# Allegro board RK3568_Template_DDR4P416DD6_51x33_1600MHz_V10_20210129YWQ.brd
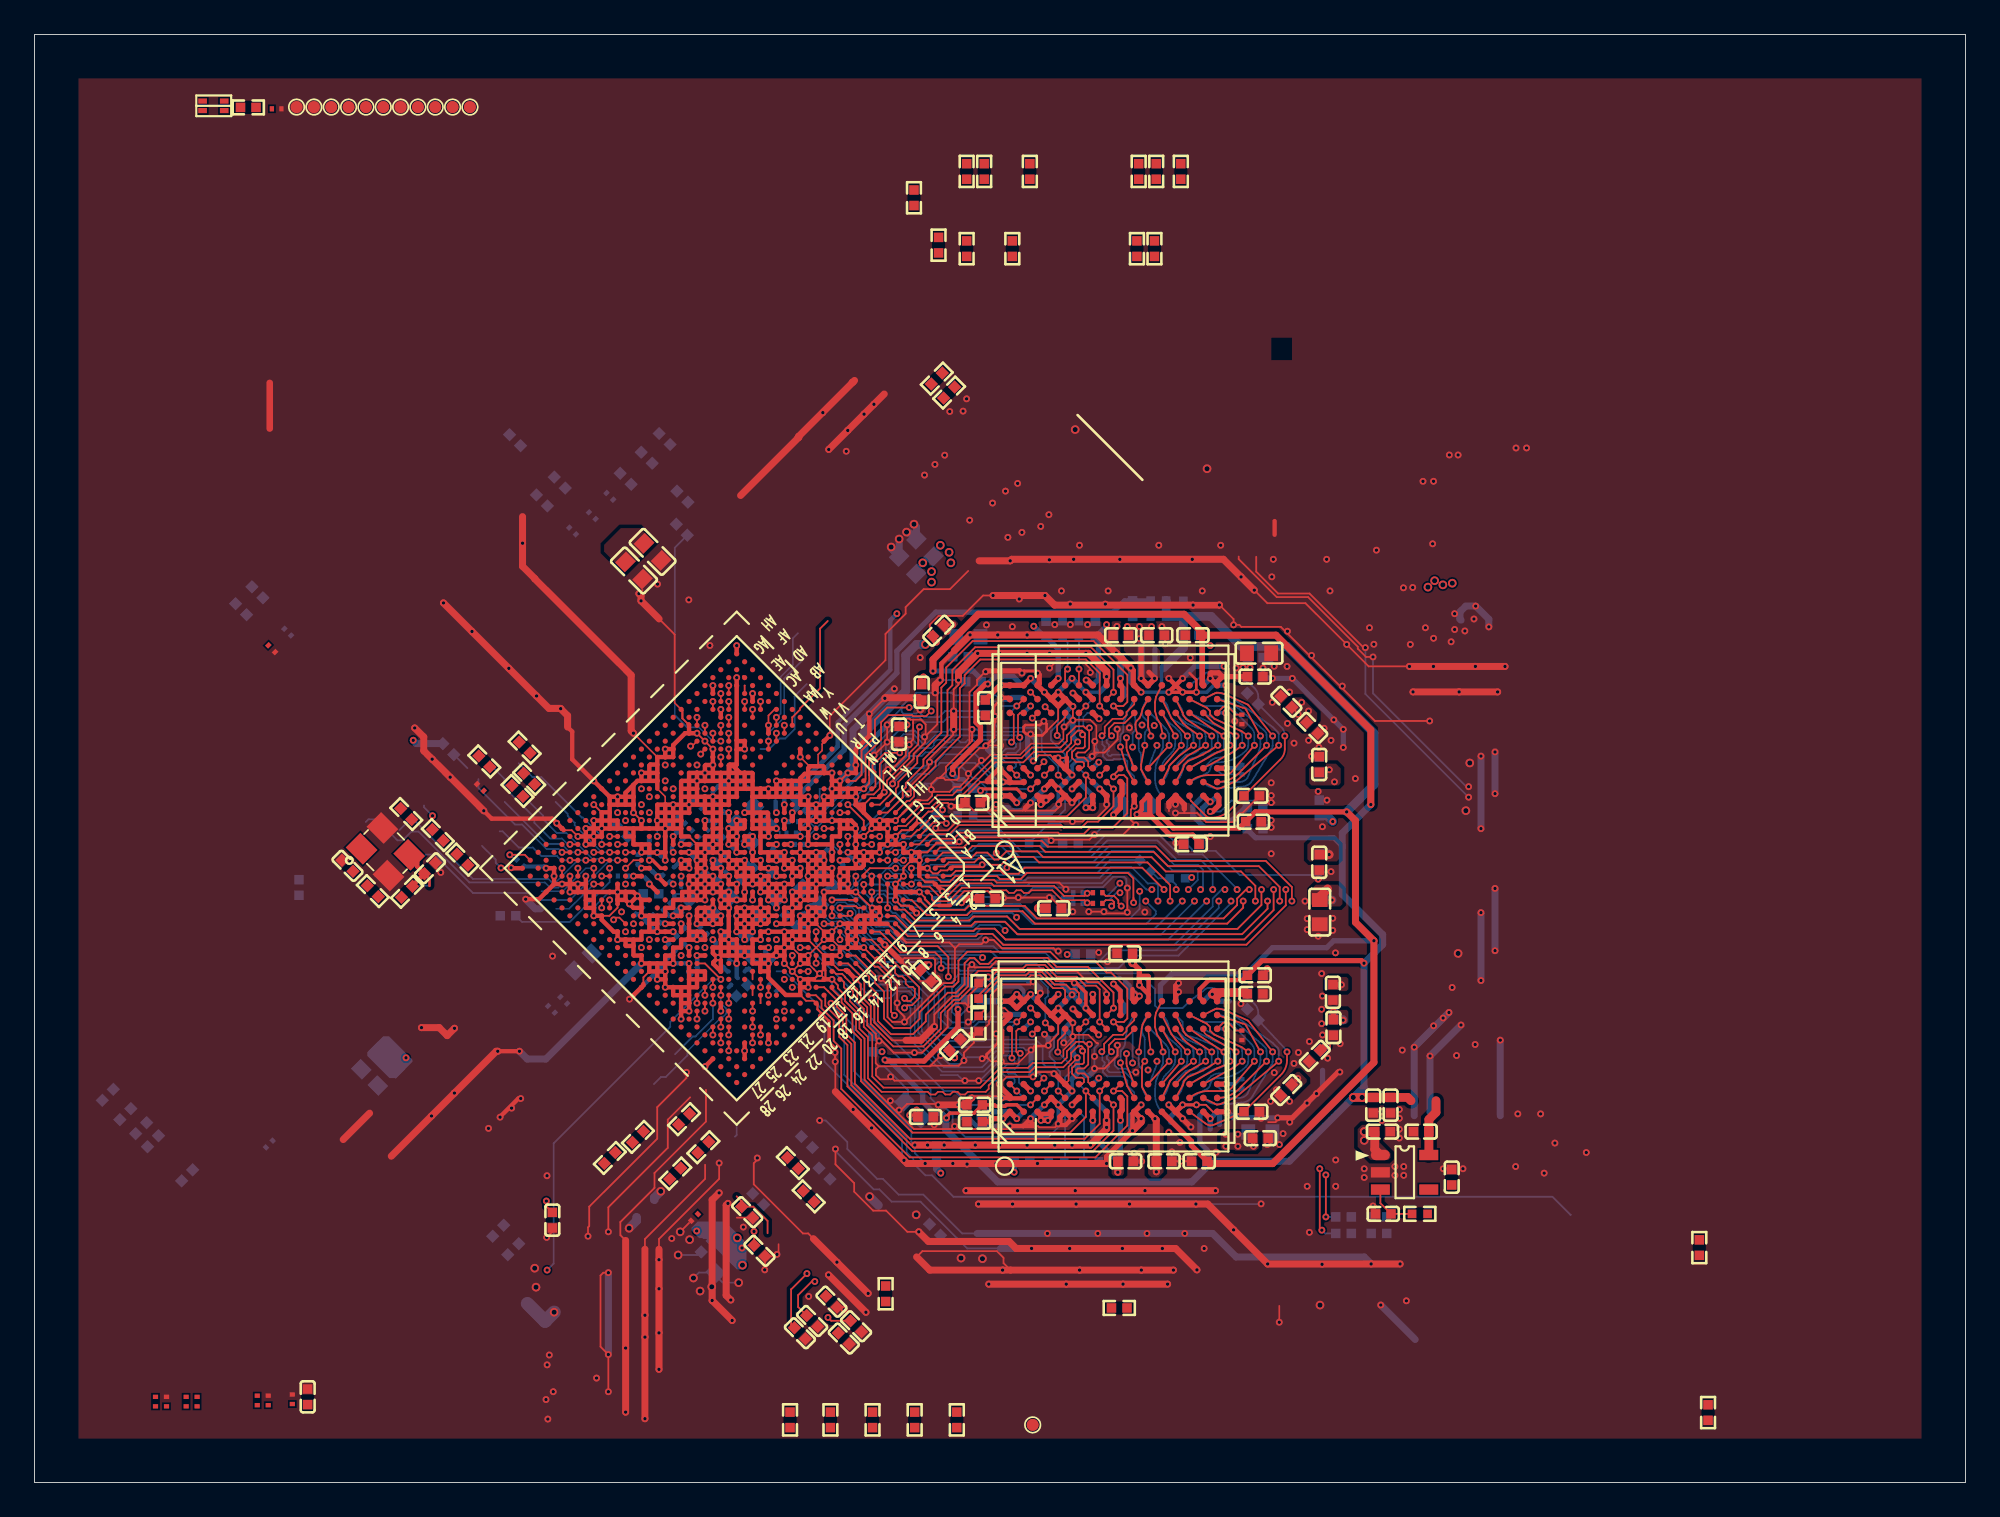
[diagram p0: board, top side]
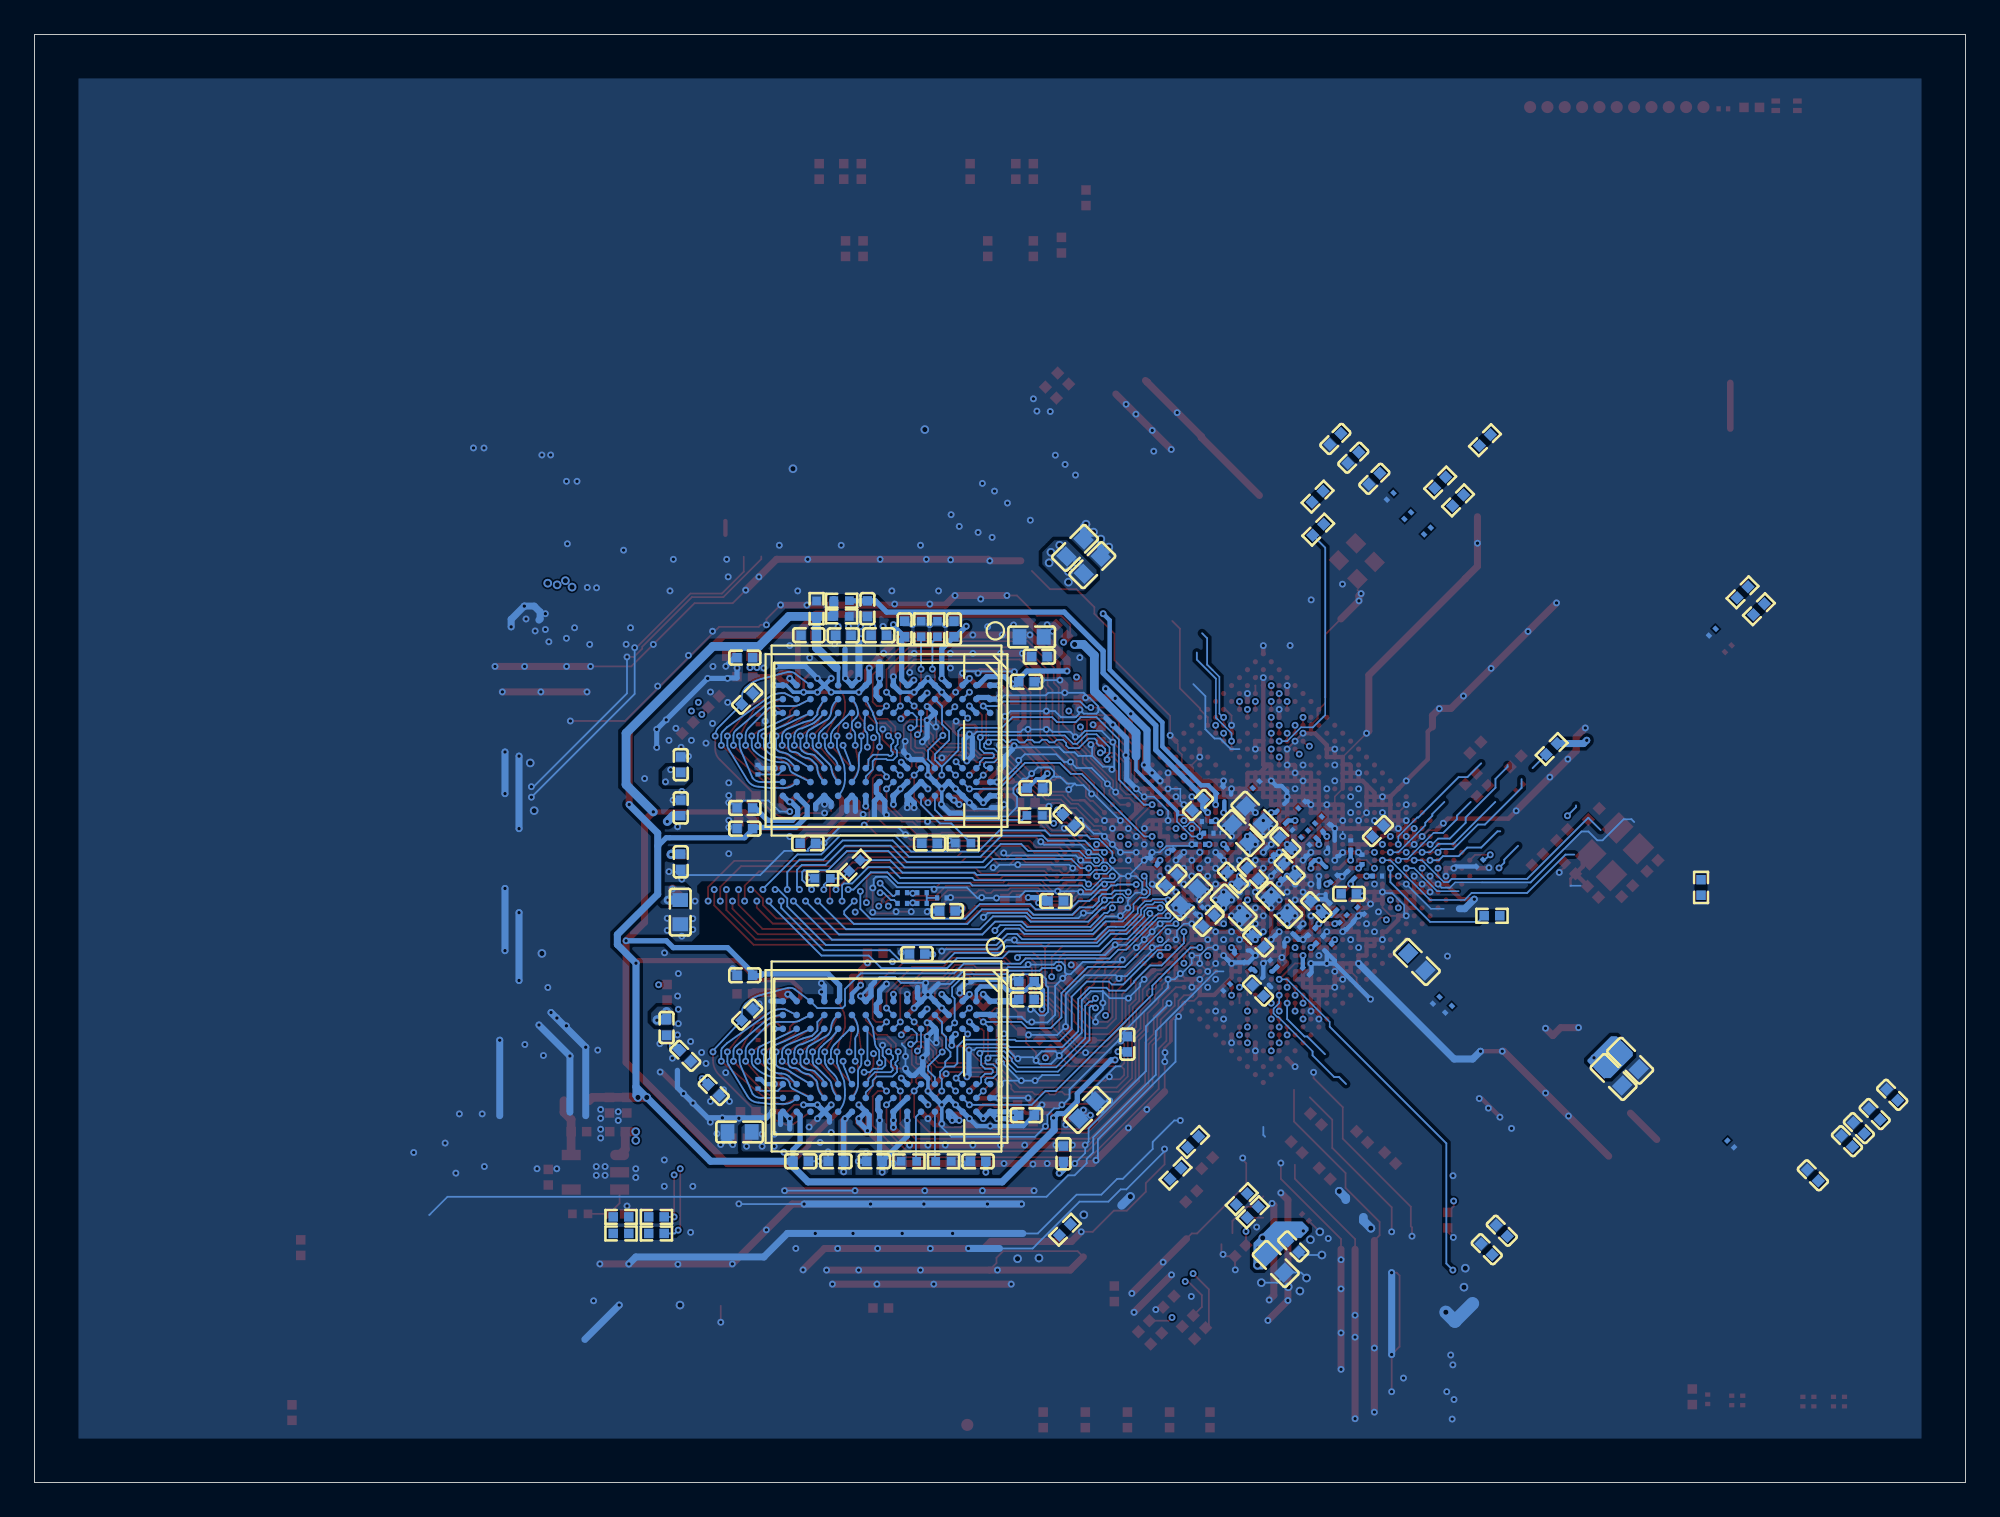
[diagram p1: board, bottom side, seen from below]

Outline 111.76 x 83.82 mm; copper layers: TOP, L2-GND1, L3-POWER, L4-S1, L5-GND2, BOTTOM. Coordinates in mm from the lower left corner of the outline.
Outline path: 0,83.82 111.76,83.82 111.76,0 0,0 0,83.82

## Design rules (mm)
net group CAN0_RX_M1: nets CAN0_RX_M1 SDMMC0_CLK
net group CIF_CLKOUT: nets CIF_CLKOUT CIF_CLKOUT_SOC
net group CLK0: nets PCIE20_REFCLKN PCIE20_REFCLKP
net group CLK32K_OUT1_WIFI: nets CLK32K_OUT1_WIFI GPIO2_C6
net group DP_EDP_TXD0: nets EDP_TXD0N EDP_TXD0P
net group DP_HDMI_TX1: nets HDMI_TX1N HDMI_TX1P
net group DP_HDMI_TX2: nets HDMI_TX2N HDMI_TX2P
net group DP_TX_AUX: nets EDP_TX_AUXN EDP_TX_AUXP
net group DP_TX_D0: nets EDP_TX_D0N EDP_TX_D0P
net group EDP_TXD1N: nets EDP_TX_D1N EDP_TXD1N
net group EDP_TXD2N: nets EDP_TX_D2N EDP_TXD2N
net group EDP_TXD3N: nets EDP_TX_D3N EDP_TXD3N
net group EDP_TXD3P: nets EDP_TX_D3P EDP_TXD3P
net group EMMC_CLKOUT/FLASH_DQS: nets EMMC_CLKOUT/FLASH_DQS EMMC_CLKOUT/FLASH_DQS_SOC
net group ETH1_REFCLKO_25M_M1: nets ETH1_REFCLKO_25M_M1 ETH1_REFCLKO_25M_M1_SOC
net group GMAC1_TXCLK_M1: nets GMAC1_TXCLK_M1 GMAC1_TXCLK_M1_SOC
net group GMAC1_TXD0_M1: nets GMAC1_TXD0_M1 GMAC1_TXD0_M1_SOC
net group GMAC1_TXD1_M1: nets GMAC1_TXD1_M1 GMAC1_TXD1_M1_SOC
net group GMAC1_TXD2_M1: nets GMAC1_TXD2_M1 GMAC1_TXD2_M1_SOC
net group GMAC1_TXD3_M1: nets GMAC1_TXD3_M1 GMAC1_TXD3_M1_SOC
net group GMAC1_TXEN_M1: nets GMAC1_TXEN_M1 GMAC1_TXEN_M1_SOC
net group HDMI_TX0N: nets HDMI_TX0N HDMI_TX0N_PORT
net group HDMI_TX0P: nets HDMI_TX0P HDMI_TX0P_PORT
net group HDMI_TX1: nets HDMI_TX1N_PORT HDMI_TX1P_PORT
net group HDMI_TX2: nets HDMI_TX2N_PORT HDMI_TX2P_PORT
net group HDMI_TXCLKN: nets HDMI_TXCLKN HDMI_TXCLKN_PORT
net group HDMI_TXCLKP: nets HDMI_TXCLKP HDMI_TXCLKP_PORT
net group LVDS_TX0_CLK: nets MIPI_DSI_TX0_CLKN/LVDS_TX0_CLKN MIPI_DSI_TX0_CLKP/LVDS_TX0_CLKP
net group LVDS_TX0_D0: nets MIPI_DSI_TX0_D0N/LVDS_TX0_D0N MIPI_DSI_TX0_D0P/LVDS_TX0_D0P
net group LVDS_TX0_D1: nets MIPI_DSI_TX0_D1N/LVDS_TX0_D1N MIPI_DSI_TX0_D1P/LVDS_TX0_D1P
net group LVDS_TX0_D2: nets MIPI_DSI_TX0_D2N/LVDS_TX0_D2N MIPI_DSI_TX0_D2P/LVDS_TX0_D2P
net group LVDS_TX0_D3: nets MIPI_DSI_TX0_D3N/LVDS_TX0_D3N MIPI_DSI_TX0_D3P/LVDS_TX0_D3P
net group LVDS_TX1_CLK: nets MIPI_DSI_TX1_CLKN MIPI_DSI_TX1_CLKP
net group LVDS_TX1_D0: nets MIPI_DSI_TX1_D0N MIPI_DSI_TX1_D0P
net group LVDS_TX1_D1: nets MIPI_DSI_TX1_D1N MIPI_DSI_TX1_D1P
net group LVDS_TX1_D2: nets MIPI_DSI_TX1_D2N MIPI_DSI_TX1_D2P
net group LVDS_TX1_D3: nets MIPI_DSI_TX1_D3N MIPI_DSI_TX1_D3P
net group MIPI_CSI_RX_CLK0: nets MIPI_CSI_RX_CLK0N MIPI_CSI_RX_CLK0P
net group MIPI_CSI_RX_CLK1: nets MIPI_CSI_RX_CLK1N MIPI_CSI_RX_CLK1P
net group MIPI_CSI_RX_D0: nets MIPI_CSI_RX_D0N MIPI_CSI_RX_D0P
net group MIPI_CSI_RX_D1: nets MIPI_CSI_RX_D1N MIPI_CSI_RX_D1P
net group MIPI_CSI_RX_D2: nets MIPI_CSI_RX_D2N MIPI_CSI_RX_D2P
net group MIPI_CSI_RX_D3: nets MIPI_CSI_RX_D3N MIPI_CSI_RX_D3P
net group PCIE30_REFCLK_IN: nets PCIE30_REFCLKN_IN PCIE30_REFCLKP_IN
net group PCIE30_RX0: nets PCIE30_RX0N PCIE30_RX0P
net group PCIE30_RX1: nets PCIE30_RX1N PCIE30_RX1P
net group PCIE30_TX0: nets PCIE30_TX0N PCIE30_TX0P
net group PCIE30_TX1: nets PCIE30_TX1N PCIE30_TX1P
net group SARADC_VIN0_KEY/RECOVERY: nets SARADC_VIN0_KEY/RECOVERY VCCA_1V8
net group SDMMC0_D2/ARMJTAG_TCK: nets N17520091 SDMMC0_D2/ARMJTAG_TCK
net group SDMMC0_D3/ARMJTAG_TMS: nets N17520047 SDMMC0_D3/ARMJTAG_TMS
net group USB2_HOST2D: nets USB2_HOST2_DM USB2_HOST2_DP
net group USB2_HOST3D: nets USB2_HOST3_DM USB2_HOST3_DP
net group USB3_HOST1D: nets USB3_HOST1_DM USB3_HOST1_DP
net group USB3_OTG0D: nets USB3_OTG0_DM USB3_OTG0_DP
net group DDR4_0_CLKN: nets DDR4_0_CLKN DDR4_1_CLKN DDR4_CLKN
net group DDR4_0_CLKP: nets DDR4_0_CLKP DDR4_1_CLKP DDR4_CLKP
net group DDR_CA: nets DDR4_BG1 DDR4_BG1//VSS DDR4_RESETN
net group DP_TX_D1: nets EDP_TXD1P
net group EDP/DP_TXD2: nets EDP_TXD2P
net group I2C2_SCL_M1: nets I2C2_SCL_M1 VCC_1V8 VCC_3V3 VCCIO4 VCCIO6 VCCIO_WL

## Placement (name value [footprint] x y rotation side)
C1000  100nF  [C0402]  40.93 31.32 225 bottom
C1001  4.7uF  [C0402]  38.9 13.66 225 bottom
C1002  22uF  [C0603]  31.76 30.13 225 bottom
C1003  22uF  [C0603]  42.36 33.29 45 bottom
C1004  22uF  [C0603]  39.92 12.65 225 bottom
C1005  100nF  [C0201]  39.81 35.12 225 bottom
C1006  4.7uF  [C0402]  39.13 35.5 225 bottom
C1007  1uF  [C0402]  41.26 35.26 45 bottom
C1008  1uF  [C0402]  42.4 35.01 225 bottom
C1009  22uF  [C0603]  41.94 37.59 45 bottom
C1010  22uF  [C0603]  51.54 54.1 135 bottom
C1011  10uF  [C0603]  50.54 53.1 135 bottom
C1012  100nF  [C0201]  40.25 36.53 225 bottom
C1013  4.7uF  [C0402]  39.36 37.03 225 bottom
C1014  22uF  [C0603]  41.16 38.66 45 bottom
C1015  22uF  [C0603]  34.7 52.8 315 top
C1016  10uF  [C0603]  35.77 53.87 315 top
C1017  100nF  [C0201]  38.73 31.95 315 bottom
C1018  22uF  [C0603]  39.71 33.42 45 bottom
C1019  22uF  [C0603]  20.36 23.48 225 bottom
C1020  10uF  [C0603]  19.41 24.42 225 bottom
C1100  100nF  [C0201]  44.36 33.11 315 bottom
C1101  100nF  [C0201]  45.67 36.42 45 bottom
C1102  4.7uF  [C0402]  45.95 34.88 315 bottom
C1103  4.7uF  [C0402]  43.81 32.51 315 bottom
C1104  10uF  [C0603]  44.93 33.89 315 bottom
C1200  100nF  [C0201]  28.12 35.85 315 bottom
C1201  18pF  [C0402]  18.11 35.7 135 top
C1202  18pF  [C0402]  22.89 35.56 45 top
C1203  100nF  [C0201]  34.93 36.07 90 bottom
C1204  1uF  [C0402]  6.17 20.51 45 bottom
C1205  100nF  [C0201]  35.56 35.18 45 bottom
C1206  1uF  [C0402]  4.24 22.44 45 bottom
C1207  100nF  [C0201]  34.04 35.1 180 bottom
C1208  1uF  [C0402]  35.43 59.32 315 bottom
C1209  100nF  [C0201]  42.93 36.47 315 bottom
C1210  100nF  [C0201]  35.58 36.89 90 bottom
C1211  1uF  [C0402]  36.47 60.41 315 bottom
C1212  100nF  [C0201]  44.28 36.94 0 bottom
C1213  100nF  [C0201]  36.55 34.95 135 bottom
C1214  1uF  [C0402]  5.26 21.32 45 bottom
C1300  100nF  [C0201]  42.5 30.44 315 bottom
C1301  100nF  [C0201]  38.16 29.59 225 bottom
C1400  100nF  [C0402]  29.97 15.18 270 top
C1401  100nF  [C0201]  37.38 31.41 135 bottom
C1402  100nF  [C0201]  36.89 30.97 315 bottom
C1403  100nF  [C0201]  37.84 31.88 315 bottom
C1404  100nF  [C0201]  43.8 37.59 180 bottom
C1405  100nF  [C0201]  43.92 38.26 0 bottom
C1406  100nF  [C0201]  43.16 40.09 135 bottom
C1407  100nF  [C0201]  36.03 32.21 225 bottom
C1408  100nF  [C0201]  36.6 33.32 45 bottom
C1409  4.7uF  [C0402]  37.57 33.3 45 bottom
C1410  4.7uF  [C0402]  8.83 17.78 45 bottom
C1411  100nF  [C0201]  35 33.1 225 bottom
C1412  100nF  [C0201]  35.62 32.66 225 bottom
C1413  4.7uF  [C0402]  35.69 34.07 180 bottom
C1414  4.7uF  [C0402]  6.86 19.75 45 bottom
C1500  100nF  [C0201]  38.2 15.34 225 top
C1501  1nF  [C0402]  41.25 15.65 315 top
C1502  1nF  [C0402]  41.96 13.41 315 top
C1503  1nF  [C0402]  47.55 9.04 315 top
C1504  1nF  [C0402]  46.84 8.33 315 top
C1505  1nF  [C0402]  46.13 10.46 315 top
C1506  1nF  [C0402]  45.01 9.35 315 top
C1507  1nF  [C0402]  44.3 8.64 315 top
C1508  1nF  [C0402]  40.94 28.47 45 bottom
C1509  100nF  [C0201]  41.55 29.91 45 bottom
C1510  100nF  [C0201]  40.05 30.03 45 bottom
C1511  100nF  [C0201]  14.01 79.52 0 top
C1600  100nF  [C0201]  38.41 39.22 135 bottom
C1601  100nF  [C0201]  39.15 37.97 225 bottom
C1602  100nF  [C0201]  33.3 57.09 315 bottom
C1603  1uF  [C0402]  34.21 58.1 315 bottom
C1700  100nF  [C0201]  36.99 37.89 135 bottom
C1701  100nF  [C0201]  37.77 37.11 315 bottom
C1702  100nF  [C0201]  13.73 48.27 315 top
C1703  100nF  [C0201]  14.65 49.22 315 bottom
C1704  100nF  [C0201]  37.45 38.35 135 bottom
C1705  100nF  [C0201]  38.25 37.54 315 bottom
C1706  100nF  [C0201]  32.28 55.97 315 bottom
C1707  100nF  [C0201]  31.14 55.08 315 bottom
C1708  100nF  [C0201]  7 4.68 90 top
C1709  100nF  [C0201]  8.77 4.68 90 top
C1710  100nF  [C0201]  9.41 4.68 90 top
C1711  100nF  [C0201]  12.89 4.75 90 top
C1712  100nF  [C0201]  7.64 4.68 90 top
C1713  100nF  [C0201]  13.53 4.75 90 top
C1714  100nF  [C0201]  14.92 4.82 90 top
C1715  1uF  [C0402]  15.81 4.96 90 top
C1716  1uF  [C0402]  34.01 37.71 135 bottom
C1717  100nF  [C0201]  29.92 27.39 315 bottom
C1718  100nF  [C0201]  30.63 27.91 315 bottom
C1719  4.7uF  [C0402]  27.71 13.5 45 bottom
C1720  4.7uF  [C0402]  26.84 14.57 45 bottom
C1800  100nF  [C0201]  41.06 40.39 135 bottom
C1900  100nF  [C0201]  42.76 28.66 315 bottom
C3400  1nF  [C0402]  70.51 45.37 135 bottom
C3401  1nF  [C0402]  70.45 39.75 0 top
C3402  1nF  [C0402]  70.51 27.08 135 bottom
C3403  1nF  [C0402]  70.45 21.46 0 top
C3404  100pF  [C0201]  59.24 33.84 180 bottom
C3405  1nF  [C0402]  67.41 18.6 180 top
C3406  1nF  [C0402]  66.95 49.05 0 bottom
C3407  1nF  [C0402]  70.65 29.36 0 bottom
C3408  1nF  [C0402]  70.55 38.25 0 top
C3409  1uF  [C0402]  78.02 20.31 0 top
C3410  4.7uF  [C0402]  77.48 21.84 270 top
C3411  4.7uF  [C0402]  78.49 21.84 270 top
C3412  100nF  [C0402]  67.41 18.6 180 bottom
C3413  100nF  [C0402]  54.41 21.86 180 top
C3414  100nF  [C0402]  70.65 37.85 0 bottom
C3415  100nF  [C0402]  70.65 29.36 0 top
C3416  100nF  [C0402]  54.35 46.35 180 bottom
C3417  100nF  [C0402]  67.05 49.05 180 top
C3418  100nF  [C0402]  53.85 40.2 180 bottom
C3419  100nF  [C0402]  54.35 29 0 bottom
C3420  DNP  [C0402]  82.03 17.67 90 top
C3421  DNP  [C0402]  78.06 15.55 180 top
C3422  22uF  [C0603]  74.39 33.01 270 bottom
C3423  10uF  [C0603]  70.95 20.29 0 bottom
C3424  10uF  [C0603]  50.84 21.56 135 bottom
C3425  100nF  [C0402]  58.93 33.08 0 bottom
C3426  100nF  [C0402]  63.15 18.6 0 bottom
C3427  100nF  [C0402]  75.18 26.34 270 bottom
C3428  100nF  [C0402]  54.3 39.35 180 top
C3429  100nF  [C0402]  53.6 47.8 0 bottom
C3430  100nF  [C0402]  74.36 35.9 270 top
C3431  100nF  [C0402]  75.15 28.38 270 top
C3432  100nF  [C0402]  66.95 36.95 180 top
C3433  100nF  [C0402]  74.36 41.56 90 top
C3434  100nF  [C0402]  72.45 22.72 225 top
C3435  100nF  [C0402]  74.36 41.55 90 bottom
C3436  100nF  [C0402]  51.91 38.34 225 bottom
C3437  100nF  [C0402]  65.38 18.6 0 bottom
C3438  100nF  [C0402]  73.96 43.68 315 top
C3439  1nF  [C0402]  54.35 27.96 180 bottom
C3440  100nF  [C0402]  58.54 49.41 90 bottom
C3441  100nF  [C0402]  51.35 45.74 270 top
C3442  100nF  [C0402]  51.58 29.33 315 top
C3443  100nF  [C0402]  74.1 24.7 225 bottom
C3444  100nF  [C0402]  70.65 28.28 0 top
C3445  100nF  [C0402]  55.15 33.8 0 top
C3446  100nF  [C0402]  54.35 21.26 180 bottom
C3447  100nF  [C0402]  60.68 30.59 0 bottom
C3448  100nF  [C0402]  51.57 21.16 0 top
C3449  100nF  [C0402]  70.65 46.65 0 top
C3450  100nF  [C0402]  64.95 49.04 0 bottom
C3451  100nF  [C0402]  62.87 49.05 180 top
C3452  22uF  [C0603]  74.39 33.01 270 top
C3453  10uF  [C0603]  70.87 48.01 0 top
C3454  10uF  [C0603]  54.05 48.95 0 bottom
C3455  100nF  [C0402]  50.03 43.32 270 top
C3456  100nF  [C0402]  63.1 30.63 180 top
C3457  100nF  [C0402]  52.21 19.03 90 bottom
C3458  100nF  [C0402]  59.95 37 180 bottom
C3459  100nF  [C0402]  70.65 47.75 0 bottom
C3460  100nF  [C0402]  72.45 22.72 225 bottom
C3461  100nF  [C0402]  64.95 49.05 0 top
C3462  100nF  [C0402]  72.45 45.2 135 top
C3463  100nF  [C0402]  48.51 25.37 90 bottom
C3464  100nF  [C0402]  52.65 33.66 180 bottom
C3465  100nF  [C0402]  54.41 20.88 180 top
C3466  100nF  [C0402]  52.31 49.31 225 top
C3467  100nF  [C0402]  65.38 18.6 0 top
C3468  100nF  [C0402]  74.36 35.93 270 bottom
C3469  1nF  [C0402]  55.02 44.85 270 top
C3470  100nF  [C0402]  57.15 18.59 0 bottom
C3471  100nF  [C0402]  62.89 49.05 180 bottom
C3472  100nF  [C0402]  74.1 24.7 225 top
C3473  100nF  [C0402]  53.27 25.34 45 top
C3474  100nF  [C0402]  75.18 26.34 270 top
C3475  100nF  [C0402]  74.36 39.05 90 bottom
C3476  100nF  [C0402]  63.15 18.6 0 top
C3477  100nF  [C0402]  70.95 19.93 0 top
C3478  100nF  [C0402]  58.99 33.24 0 top
C3479  100nF  [C0402]  70.65 39.05 0 bottom
C3480  100nF  [C0402]  67 37 180 bottom
C3481  100nF  [C0402]  61.4 49.41 90 bottom
C3482  1nF  [C0402]  63.55 50.59 90 bottom
C3483  1nF  [C0402]  44.43 39.22 315 bottom
C3484  4.7uF  [C0402]  80.25 20.31 180 top
L1700  NC  [RP2_0405]  10.35 79.7 0 top
NOREF  -  []  43.94 -21.46 0 top
NOREF#2  -  []  59.05 94.23 0 top
R1100  120R  [R0201]  46.97 35.95 45 bottom
R1200  22R  [R0402]  19.58 34.23 315 top
R1201  0R  [R0402]  23.34 37.48 315 top
R1202  1M  [R0402]  21.56 34.19 45 top
R1203  22R  [R0402]  24.76 36.06 135 top
R1204  2.2K  [R0402]  21.51 38.7 135 top
R1205  2.2K  [R0402]  27.4 32.8 180 bottom
R1206  2.2K  [R0402]  15.3 34.44 90 bottom
R1207  2.2K  [R0402]  23.95 42.46 315 bottom
R1300  22R  [R0402]  43.89 18.49 315 top
R1301  22R  [R0402]  62.78 10.1 0 top
R1302  22R  [R0402]  44.7 19.71 315 bottom
R1303  22R  [R0402]  44.81 16.56 315 top
R1304  22R  [R0402]  45.72 17.88 315 bottom
R1400  200R  [R0201]  13.59 19.59 225 bottom
R1500  22R  [R0402]  49.26 10.92 90 top
R1501  22R  [R0402]  41.25 15.65 135 bottom
R1502  22R  [R0402]  41.89 16.4 135 bottom
R1503  22R  [R0402]  53.38 3.62 270 top
R1504  22R  [R0402]  50.94 3.62 270 top
R1505  22R  [R0402]  48.5 3.62 270 top
R1506  22R  [R0402]  46.06 3.62 270 top
R1507  22R  [R0402]  43.73 3.62 270 top
R1508  0R  [R0402]  38.71 19.41 225 top
R1509  0R  [R0402]  37.08 17.88 225 top
R1510  0R  [R0402]  37.59 21.03 225 top
R1511  0R  [R0402]  34.92 20 225 top
R1512  10K  [R0402]  33.3 18.78 225 top
R1600  22R  [R0402]  50.9 74.37 90 top
R1601  22R  [R0402]  52.32 71.63 90 top
R1602  22R  [R0402]  64.92 75.9 90 top
R1603  22R  [R0402]  63.8 71.42 90 top
R1604  22R  [R0402]  56.59 71.42 90 top
R1605  22R  [R0402]  63.91 75.9 90 top
R1606  2.2K  [R0402]  66.34 75.9 90 top
R1607  2.2K  [R0402]  53.95 75.9 90 top
R1608  22R  [R0402]  57.61 75.9 90 top
R1609  22R  [R0402]  53.95 71.42 90 top
R1610  0R  [R0402]  54.97 75.9 90 top
R1611  0R  [R0402]  64.82 71.42 90 top
R1700  2.2R  [R0402]  12.9 51.53 135 bottom
R1701  2.2R  [R0402]  29.37 56.85 135 bottom
R1702  2.2R  [R0402]  11.95 50.55 135 bottom
R1703  2.2R  [R0402]  30.4 57.88 135 bottom
R1704  2.2R  [R0402]  26.03 41.74 135 top
R1705  2.2R  [R0402]  27.95 40.03 135 top
R1706  2.2R  [R0402]  28.63 40.74 135 top
R1707  2.2R  [R0402]  28.36 42.54 135 top
R1708  1.62K  [R0201]  25.8 40.24 135 top
R1800  10K  [R0402]  37.5 57.07 315 bottom
R1801  10K  [R0402]  37.46 55.16 315 bottom
R1802  22R  [R0402]  52.22 63.91 225 top
R1803  22R  [R0402]  52.93 63.09 225 top
R1804  2.2K  [R0402]  27.81 60.34 135 bottom
R1805  2.2K  [R0402]  12.37 79.6 0 top
R1900  2.2K  [R0402]  75.77 15.37 180 bottom
R1901  2.2K  [R0402]  75.77 14.42 180 bottom
R1902  22R  [R0402]  77.82 15.37 0 bottom
R1903  22R  [R0402]  77.82 14.42 0 bottom
R1904  22R  [R0402]  52.12 14.63 315 bottom
R1905  22R  [R0402]  96.86 4.04 270 top
R1906  22R  [R0402]  96.35 13.59 270 top
R3400  240R  [R0402#2]  60.44 49.41 90 bottom
R3401  240R  [R0402#2]  54.64 28.46 90 top
R3402  240R  [R0402#2]  58.01 37.01 0 bottom
R3403  240R  [R0402#2]  61.15 18.59 0 bottom
R3404  0R  [R0201]  69.88 44.17 270 top
R3405  0R  [R0201]  69.88 25.89 270 top
R3406  0R  [R0201]  69.89 41.26 90 bottom
R3407  0R  [R0201]  69.89 23.08 90 bottom
R3408  0R  [R0402#2]  59.5 49.41 90 bottom
R3409  0R  [R0402#2]  54.64 26.56 270 top
R3410  0R  [R0402#2]  53.87 38.61 180 bottom
R3411  0R  [R0402#2]  59.15 18.59 180 bottom
R3412  49.9R  [R0201]  60.4 34.14 180 bottom
R3413  49.9R  [R0201]  60.4 33.52 180 bottom
R3414  1K  [R0402#2]  65.05 50.14 0 bottom
R3415  0R  [R0402#2]  65.05 51.05 180 bottom
R3416  1K  [R0402#2]  66.5 50.59 90 bottom
R3417  10K  [R0402#2]  80.18 15.55 180 top
R3418  0R  [R0402#2]  66.15 34.97 0 bottom
R3419  0R  [R0402#2]  64.29 35.71 135 bottom
R3420  22R  [R0201]  61.53 33.52 0 bottom
R3421  22R  [R0201]  61.53 34.14 0 bottom
R3422  22R  [R0201]  61.53 33.52 0 top
R3423  22R  [R0201]  61.53 34.14 0 top
TP1300  TP_0.7  [TP_0R70]  19.18 79.62 0 top
TP1301  TP_0.7  [TP_0R70]  15.17 79.62 0 top
TP1302  TP_0.7  [TP_0R70]  57.77 3.33 0 top
TP1303  TP_0.7  [TP_0R70]  16.17 79.62 0 top
TP1304  TP_0.7  [TP_0R70]  17.17 79.62 0 top
TP1305  TP_0.7  [TP_0R70]  18.18 79.62 0 top
TP1500  TP_0.7  [TP_0R70]  25.2 79.62 0 top
TP1501  TP_0.7  [TP_0R70]  20.18 79.62 0 top
TP1502  TP_0.7  [TP_0R70]  21.19 79.62 0 top
TP1600  TP_0.7  [TP_0R70]  22.19 79.62 0 top
TP1800  TP_0.7  [TP_0R70]  23.19 79.62 0 top
TP1801  TP_0.7  [TP_0R70]  24.2 79.62 0 top
U1000  RK3568  [BGA636_19R00X19R00X1R20]  40.64 35.56 225 top
U3400  DDR4_16bit  [FBGA96_14R00X11R00X1R20]  62.45 42.95 90 top
U3401  DDR4_16bit  [FBGA96_14R00X11R00X1R20]  62.45 24.66 90 top
U3402  DDR4_16bit  [FBGA96_14R00X11R00X1R20]  62.45 42.95 270 bottom
U3403  DDR4_16bit  [FBGA96_14R00X11R00X1R20]  62.45 24.66 270 bottom
U3404  PT5108E23E-25  [SOT_23_5]  77.9 18.96 0 top
Y1200  24MHz  [CRY4_3R20X2R50X0R80]  20.31 36.51 315 top

## Library data of the parts
C1000-C1020 C1100-C1104 C1200-C1214 C1300 C1301 C1400-C1414 C1500-C1511 C1600-C1603 C1700-C1707 C1716-C1720 C1800 C1900 C3400-C3484 = CAP NP
C1708-C1715 = CAP NP: signal model: CAP_NP_C0201_100NF_100nF
L1700 = INDUCTOR COM
R1100 R1200-R1207 R1301 R1400 R1500-R1507 R1606 R1700-R1703 R1800-R1805 R1900-R1906 R3400-R3419 = RESISTOR
R1300 R1302-R1304 R1600-R1605 R1607-R1611 = RESISTOR: signal model: RESISTOR_R0402_0R_0R
R1508-R1512 = RESISTOR: signal model: RESISTOR_R0402_22R_22R
R1704-R1708 = RESISTOR: signal model: RESISTOR_R0402_2.2R_2.2R
R3420-R3423 = RESISTOR: signal model: RESISTOR_R0201_22R_22R
TP1300-TP1305 TP1500-TP1502 TP1600 TP1800 TP1801 = TP
U1000 = SOC_RK3568
U3400-U3403 = DDR4_16bit
U3404 = LDO_PT5108
Y1200 = CRYSTAL_4P

## Footprints (pads in the part's own frame, mm; a bottom-side part is the same pattern mirrored in y, then rotated)
BGA636_19R00X19R00X1R20
  round 0.3 smd: A1(-8.775,8.775) A2(-8.125,8.775) A3(-7.475,8.775) A4(-6.825,8.775) A5(-6.175,8.775) A6(-5.525,8.775) A7(-4.875,8.775) A8(-4.225,8.775) A9(-3.575,8.775) A10(-2.925,8.775) A11(-2.275,8.775) A12(-1.625,8.775) A13(-0.975,8.775) A14(-0.325,8.775) A15(0.325,8.775) A16(0.975,8.775) A17(1.625,8.775) A18(2.275,8.775) A19(2.925,8.775) A20(3.575,8.775) A21(4.225,8.775) A22(4.875,8.775) A23(5.525,8.775) A24(6.175,8.775) A25(6.825,8.775) A26(7.475,8.775) A27(8.125,8.775) A28(8.775,8.775) AA1(-8.775,-4.225) AA2(-8.125,-4.225) AA3(-7.475,-4.225) AA4(-6.825,-4.225) AA5(-6.175,-4.225) AA6(-5.525,-4.225) AA7(-4.875,-4.225) AA9(-3.575,-4.225) AA11(-2.275,-4.225) AA12(-1.625,-4.225) AA14(-0.325,-4.225) AA15(0.325,-4.225) AA17(1.625,-4.225) AA18(2.275,-4.225) AA20(3.575,-4.225) AA22(4.875,-4.225) AA23(5.525,-4.225) AA24(6.175,-4.225) AA25(6.825,-4.225) AA26(7.475,-4.225) AA27(8.125,-4.225) AA28(8.775,-4.225) AB1(-8.775,-4.875) AB2(-8.125,-4.875) AB5(-6.175,-4.875) AB6(-5.525,-4.875) AB8(-4.225,-4.875) AB9(-3.575,-4.875) AB11(-2.275,-4.875) AB12(-1.625,-4.875) AB14(-0.325,-4.875) AB15(0.325,-4.875) AB17(1.625,-4.875) AB18(2.275,-4.875) AB20(3.575,-4.875) AB21(4.225,-4.875) AB23(5.525,-4.875) AB24(6.175,-4.875) AB27(8.125,-4.875) AB28(8.775,-4.875) AC1(-8.775,-5.525) AC2(-8.125,-5.525) AC3(-7.475,-5.525) AC4(-6.825,-5.525) AC5(-6.175,-5.525) AC7(-4.875,-5.525) AC8(-4.225,-5.525) AC9(-3.575,-5.525) AC11(-2.275,-5.525) AC12(-1.625,-5.525) AC14(-0.325,-5.525) AC15(0.325,-5.525) AC17(1.625,-5.525) AC18(2.275,-5.525) AC20(3.575,-5.525) AC21(4.225,-5.525) AC22(4.875,-5.525) AC24(6.175,-5.525) AC25(6.825,-5.525) AC26(7.475,-5.525) AC27(8.125,-5.525) AC28(8.775,-5.525) AD1(-8.775,-6.175) AD2(-8.125,-6.175) AD3(-7.475,-6.175) AD4(-6.825,-6.175) AD6(-5.525,-6.175) AD7(-4.875,-6.175) AD8(-4.225,-6.175) AD9(-3.575,-6.175) AD11(-2.275,-6.175) AD12(-1.625,-6.175) AD14(-0.325,-6.175) AD15(0.325,-6.175) AD17(1.625,-6.175) AD18(2.275,-6.175) AD20(3.575,-6.175) AD21(4.225,-6.175) AD22(4.875,-6.175) AD23(5.525,-6.175) AD25(6.825,-6.175) AD26(7.475,-6.175) AD27(8.125,-6.175) AD28(8.775,-6.175) AE1(-8.775,-6.825) AE2(-8.125,-6.825) AE3(-7.475,-6.825) AE5(-6.175,-6.825) AE6(-5.525,-6.825) AE8(-4.225,-6.825) AE9(-3.575,-6.825) AE11(-2.275,-6.825) AE12(-1.625,-6.825) AE14(-0.325,-6.825) AE15(0.325,-6.825) AE17(1.625,-6.825) AE18(2.275,-6.825) AE20(3.575,-6.825) AE21(4.225,-6.825) AE23(5.525,-6.825) AE24(6.175,-6.825) AE26(7.475,-6.825) AE27(8.125,-6.825) AE28(8.775,-6.825) AF1(-8.775,-7.475) AF2(-8.125,-7.475) AF3(-7.475,-7.475) AF4(-6.825,-7.475) AF5(-6.175,-7.475) AF6(-5.525,-7.475) AF8(-4.225,-7.475) AF9(-3.575,-7.475) AF11(-2.275,-7.475) AF12(-1.625,-7.475) AF14(-0.325,-7.475) AF15(0.325,-7.475) AF17(1.625,-7.475) AF18(2.275,-7.475) AF20(3.575,-7.475) AF21(4.225,-7.475) AF23(5.525,-7.475) AF24(6.175,-7.475) AF25(6.825,-7.475) AF26(7.475,-7.475) AF27(8.125,-7.475) AF28(8.775,-7.475) AG1(-8.775,-8.125) AG2(-8.125,-8.125) AG3(-7.475,-8.125) AG4(-6.825,-8.125) AG5(-6.175,-8.125) AG6(-5.525,-8.125) AG7(-4.875,-8.125) AG8(-4.225,-8.125) AG9(-3.575,-8.125) AG10(-2.925,-8.125) AG11(-2.275,-8.125) AG12(-1.625,-8.125) AG13(-0.975,-8.125) AG14(-0.325,-8.125) AG15(0.325,-8.125) AG16(0.975,-8.125) AG17(1.625,-8.125) AG18(2.275,-8.125) AG19(2.925,-8.125) AG20(3.575,-8.125) AG21(4.225,-8.125) AG22(4.875,-8.125) AG23(5.525,-8.125) AG24(6.175,-8.125) AG25(6.825,-8.125) AG26(7.475,-8.125) AG27(8.125,-8.125) AG28(8.775,-8.125) AH1(-8.775,-8.775) AH2(-8.125,-8.775) AH3(-7.475,-8.775) AH4(-6.825,-8.775) AH5(-6.175,-8.775) AH6(-5.525,-8.775) AH7(-4.875,-8.775) AH8(-4.225,-8.775) AH9(-3.575,-8.775) AH10(-2.925,-8.775) AH11(-2.275,-8.775) AH12(-1.625,-8.775) AH13(-0.975,-8.775) AH14(-0.325,-8.775) AH15(0.325,-8.775) AH16(0.975,-8.775) AH17(1.625,-8.775) AH18(2.275,-8.775) AH19(2.925,-8.775) AH20(3.575,-8.775) AH21(4.225,-8.775) AH22(4.875,-8.775) AH23(5.525,-8.775) AH24(6.175,-8.775) AH25(6.825,-8.775) AH26(7.475,-8.775) AH27(8.125,-8.775) AH28(8.775,-8.775) B1(-8.775,8.125) B2(-8.125,8.125) B3(-7.475,8.125) B4(-6.825,8.125) B5(-6.175,8.125) B6(-5.525,8.125) B7(-4.875,8.125) B8(-4.225,8.125) B9(-3.575,8.125) B10(-2.925,8.125) B11(-2.275,8.125) B12(-1.625,8.125) B13(-0.975,8.125) B14(-0.325,8.125) B15(0.325,8.125) B16(0.975,8.125) B17(1.625,8.125) B18(2.275,8.125) B19(2.925,8.125) B20(3.575,8.125) B21(4.225,8.125) B22(4.875,8.125) B23(5.525,8.125) B24(6.175,8.125) B25(6.825,8.125) B26(7.475,8.125) B27(8.125,8.125) B28(8.775,8.125) C1(-8.775,7.475) C2(-8.125,7.475) C3(-7.475,7.475) C4(-6.825,7.475) C5(-6.175,7.475) C6(-5.525,7.475) C8(-4.225,7.475) C9(-3.575,7.475) C11(-2.275,7.475) C12(-1.625,7.475) C14(-0.325,7.475) C15(0.325,7.475) C17(1.625,7.475) C18(2.275,7.475) C20(3.575,7.475) C21(4.225,7.475) C23(5.525,7.475) C24(6.175,7.475) C25(6.825,7.475) C26(7.475,7.475) C27(8.125,7.475) C28(8.775,7.475) D1(-8.775,6.825) D2(-8.125,6.825) D3(-7.475,6.825) D5(-6.175,6.825) D6(-5.525,6.825) D8(-4.225,6.825) D9(-3.575,6.825) D11(-2.275,6.825) D12(-1.625,6.825) D14(-0.325,6.825) D15(0.325,6.825) D17(1.625,6.825) D18(2.275,6.825) D20(3.575,6.825) D21(4.225,6.825) D23(5.525,6.825) D24(6.175,6.825) D26(7.475,6.825) D27(8.125,6.825) D28(8.775,6.825) E1(-8.775,6.175) E2(-8.125,6.175) E3(-7.475,6.175) E4(-6.825,6.175) E6(-5.525,6.175) E7(-4.875,6.175) E8(-4.225,6.175) E9(-3.575,6.175) E11(-2.275,6.175) E12(-1.625,6.175) E14(-0.325,6.175) E15(0.325,6.175) E17(1.625,6.175) E18(2.275,6.175) E20(3.575,6.175) E21(4.225,6.175) E22(4.875,6.175) E23(5.525,6.175) E25(6.825,6.175) E26(7.475,6.175) E27(8.125,6.175) E28(8.775,6.175) F1(-8.775,5.525) F2(-8.125,5.525) F3(-7.475,5.525) F4(-6.825,5.525) F5(-6.175,5.525) F7(-4.875,5.525) F8(-4.225,5.525) F9(-3.575,5.525) F11(-2.275,5.525) F12(-1.625,5.525) F14(-0.325,5.525) F15(0.325,5.525) F17(1.625,5.525) F18(2.275,5.525) F20(3.575,5.525) F21(4.225,5.525) F22(4.875,5.525) F24(6.175,5.525) F25(6.825,5.525) F26(7.475,5.525) F27(8.125,5.525) F28(8.775,5.525) G1(-8.775,4.875) G2(-8.125,4.875) G5(-6.175,4.875) G6(-5.525,4.875) G8(-4.225,4.875) G9(-3.575,4.875) G11(-2.275,4.875) G12(-1.625,4.875) G14(-0.325,4.875) G15(0.325,4.875) G17(1.625,4.875) G18(2.275,4.875) G20(3.575,4.875) G21(4.225,4.875) G23(5.525,4.875) G24(6.175,4.875) G27(8.125,4.875) G28(8.775,4.875) H1(-8.775,4.225) H2(-8.125,4.225) H3(-7.475,4.225) H4(-6.825,4.225) H5(-6.175,4.225) H6(-5.525,4.225) H7(-4.875,4.225) H9(-3.575,4.225) H11(-2.275,4.225) H12(-1.625,4.225) H14(-0.325,4.225) H15(0.325,4.225) H17(1.625,4.225) H18(2.275,4.225) H20(3.575,4.225) H22(4.875,4.225) H23(5.525,4.225) H24(6.175,4.225) H25(6.825,4.225) H26(7.475,4.225) H27(8.125,4.225) H28(8.775,4.225) J1(-8.775,3.575) J2(-8.125,3.575) J3(-7.475,3.575) J4(-6.825,3.575) J5(-6.175,3.575) J6(-5.525,3.575) J7(-4.875,3.575) J8(-4.225,3.575) J9(-3.575,3.575) J11(-2.275,3.575) J12(-1.625,3.575) J14(-0.325,3.575) J15(0.325,3.575) J17(1.625,3.575) J18(2.275,3.575) J20(3.575,3.575) J21(4.225,3.575) J22(4.875,3.575) J23(5.525,3.575) J24(6.175,3.575) J25(6.825,3.575) J26(7.475,3.575) J27(8.125,3.575) J28(8.775,3.575) K1(-8.775,2.925) K2(-8.125,2.925) K10(-2.925,2.925) K11(-2.275,2.925) K12(-1.625,2.925) K13(-0.975,2.925) K14(-0.325,2.925) K15(0.325,2.925) K16(0.975,2.925) K17(1.625,2.925) K18(2.275,2.925) K19(2.925,2.925) K27(8.125,2.925) K28(8.775,2.925) L1(-8.775,2.275) L2(-8.125,2.275) L3(-7.475,2.275) L4(-6.825,2.275) L5(-6.175,2.275) L6(-5.525,2.275) L7(-4.875,2.275) L8(-4.225,2.275) L9(-3.575,2.275) L10(-2.925,2.275) L11(-2.275,2.275) L12(-1.625,2.275) L13(-0.975,2.275) L14(-0.325,2.275) L15(0.325,2.275) L16(0.975,2.275) L17(1.625,2.275) L18(2.275,2.275) L19(2.925,2.275) L20(3.575,2.275) L21(4.225,2.275) L22(4.875,2.275) L23(5.525,2.275) L24(6.175,2.275) L25(6.825,2.275) L26(7.475,2.275) L27(8.125,2.275) L28(8.775,2.275) M1(-8.775,1.625) M2(-8.125,1.625) M3(-7.475,1.625) M4(-6.825,1.625) M5(-6.175,1.625) M6(-5.525,1.625) M7(-4.875,1.625) M8(-4.225,1.625) M9(-3.575,1.625) M10(-2.925,1.625) M11(-2.275,1.625) M12(-1.625,1.625) M13(-0.975,1.625) M14(-0.325,1.625) M15(0.325,1.625) M16(0.975,1.625) M17(1.625,1.625) M18(2.275,1.625) M19(2.925,1.625) M20(3.575,1.625) M21(4.225,1.625) M22(4.875,1.625) M23(5.525,1.625) M24(6.175,1.625) M25(6.825,1.625) M26(7.475,1.625) M27(8.125,1.625) M28(8.775,1.625) N1(-8.775,0.975) N2(-8.125,0.975) N10(-2.925,0.975) N11(-2.275,0.975) N12(-1.625,0.975) N13(-0.975,0.975) N14(-0.325,0.975) N15(0.325,0.975) N16(0.975,0.975) N17(1.625,0.975) N18(2.275,0.975) N19(2.925,0.975) N27(8.125,0.975) N28(8.775,0.975) P1(-8.775,0.325) P2(-8.125,0.325) P3(-7.475,0.325) P4(-6.825,0.325) P5(-6.175,0.325) P6(-5.525,0.325) P7(-4.875,0.325) P8(-4.225,0.325) P9(-3.575,0.325) P10(-2.925,0.325) P11(-2.275,0.325) P12(-1.625,0.325) P13(-0.975,0.325) P14(-0.325,0.325) P15(0.325,0.325) P16(0.975,0.325) P17(1.625,0.325) P18(2.275,0.325) P19(2.925,0.325) P20(3.575,0.325) P21(4.225,0.325) P22(4.875,0.325) P23(5.525,0.325) P24(6.175,0.325) P25(6.825,0.325) P26(7.475,0.325) P27(8.125,0.325) P28(8.775,0.325) R1(-8.775,-0.325) R2(-8.125,-0.325) R3(-7.475,-0.325) R4(-6.825,-0.325) R5(-6.175,-0.325) R6(-5.525,-0.325) R7(-4.875,-0.325) R8(-4.225,-0.325) R9(-3.575,-0.325) R10(-2.925,-0.325) R11(-2.275,-0.325) R12(-1.625,-0.325) R13(-0.975,-0.325) R14(-0.325,-0.325) R15(0.325,-0.325) R16(0.975,-0.325) R17(1.625,-0.325) R18(2.275,-0.325) R19(2.925,-0.325) R20(3.575,-0.325) R21(4.225,-0.325) R22(4.875,-0.325) R23(5.525,-0.325) R24(6.175,-0.325) R25(6.825,-0.325) R26(7.475,-0.325) R27(8.125,-0.325) R28(8.775,-0.325) T1(-8.775,-0.975) T2(-8.125,-0.975) T10(-2.925,-0.975) T11(-2.275,-0.975) T12(-1.625,-0.975) T13(-0.975,-0.975) T14(-0.325,-0.975) T15(0.325,-0.975) T16(0.975,-0.975) T17(1.625,-0.975) T18(2.275,-0.975) T19(2.925,-0.975) T27(8.125,-0.975) T28(8.775,-0.975) U1(-8.775,-1.625) U2(-8.125,-1.625) U3(-7.475,-1.625) U4(-6.825,-1.625) U5(-6.175,-1.625) U6(-5.525,-1.625) U7(-4.875,-1.625) U8(-4.225,-1.625) U9(-3.575,-1.625) U10(-2.925,-1.625) U11(-2.275,-1.625) U12(-1.625,-1.625) U13(-0.975,-1.625) U14(-0.325,-1.625) U15(0.325,-1.625) U16(0.975,-1.625) U17(1.625,-1.625) U18(2.275,-1.625) U19(2.925,-1.625) U20(3.575,-1.625) U21(4.225,-1.625) U22(4.875,-1.625) U23(5.525,-1.625) U24(6.175,-1.625) U25(6.825,-1.625) U26(7.475,-1.625) U27(8.125,-1.625) U28(8.775,-1.625) V1(-8.775,-2.275) V2(-8.125,-2.275) V3(-7.475,-2.275) V4(-6.825,-2.275) V5(-6.175,-2.275) V6(-5.525,-2.275) V7(-4.875,-2.275) V8(-4.225,-2.275) V9(-3.575,-2.275) V10(-2.925,-2.275) V11(-2.275,-2.275) V12(-1.625,-2.275) V13(-0.975,-2.275) V14(-0.325,-2.275) V15(0.325,-2.275) V16(0.975,-2.275) V17(1.625,-2.275) V18(2.275,-2.275) V19(2.925,-2.275) V20(3.575,-2.275) V21(4.225,-2.275) V22(4.875,-2.275) V23(5.525,-2.275) V24(6.175,-2.275) V25(6.825,-2.275) V26(7.475,-2.275) V27(8.125,-2.275) V28(8.775,-2.275) W1(-8.775,-2.925) W2(-8.125,-2.925) W10(-2.925,-2.925) W11(-2.275,-2.925) W12(-1.625,-2.925) W13(-0.975,-2.925) W14(-0.325,-2.925) W15(0.325,-2.925) W16(0.975,-2.925) W17(1.625,-2.925) W18(2.275,-2.925) W19(2.925,-2.925) W27(8.125,-2.925) W28(8.775,-2.925) Y1(-8.775,-3.575) Y2(-8.125,-3.575) Y3(-7.475,-3.575) Y4(-6.825,-3.575) Y5(-6.175,-3.575) Y6(-5.525,-3.575) Y7(-4.875,-3.575) Y8(-4.225,-3.575) Y9(-3.575,-3.575) Y11(-2.275,-3.575) Y12(-1.625,-3.575) Y14(-0.325,-3.575) Y15(0.325,-3.575) Y17(1.625,-3.575) Y18(2.275,-3.575) Y20(3.575,-3.575) Y21(4.225,-3.575) Y22(4.875,-3.575) Y23(5.525,-3.575) Y24(6.175,-3.575) Y25(6.825,-3.575) Y26(7.475,-3.575) Y27(8.125,-3.575) Y28(8.775,-3.575)
C0201
  rect 0.25x0.3 smd: 1(-0.275,0) 2(0.275,0)
C0402
  rect 0.55x0.55 smd: 1(-0.45,0) 2(0.45,0)
C0603
  rect 0.8x0.9 smd: 1(-0.7,0) 2(0.7,0)
CRY4_3R20X2R50X0R80
  rect 1.4x1.2 smd: 1(-1.1,-0.85) 2(1.1,-0.85) 3(1.1,0.85) 4(-1.1,0.85)
FBGA96_14R00X11R00X1R20
  round 0.38 smd: A1(-3.2,6) A2(-2.4,6) A3(-1.6,6) A7(1.6,6) A8(2.4,6) A9(3.2,6) B1(-3.2,5.2) B2(-2.4,5.2) B3(-1.6,5.2) B7(1.6,5.2) B8(2.4,5.2) B9(3.2,5.2) C1(-3.2,4.4) C2(-2.4,4.4) C3(-1.6,4.4) C7(1.6,4.4) C8(2.4,4.4) C9(3.2,4.4) D1(-3.2,3.6) D2(-2.4,3.6) D3(-1.6,3.6) D7(1.6,3.6) D8(2.4,3.6) D9(3.2,3.6) E1(-3.2,2.8) E2(-2.4,2.8) E3(-1.6,2.8) E7(1.6,2.8) E8(2.4,2.8) E9(3.2,2.8) F1(-3.2,2) F2(-2.4,2) F3(-1.6,2) F7(1.6,2) F8(2.4,2) F9(3.2,2) G1(-3.2,1.2) G2(-2.4,1.2) G3(-1.6,1.2) G7(1.6,1.2) G8(2.4,1.2) G9(3.2,1.2) H1(-3.2,0.4) H2(-2.4,0.4) H3(-1.6,0.4) H7(1.6,0.4) H8(2.4,0.4) H9(3.2,0.4) J1(-3.2,-0.4) J2(-2.4,-0.4) J3(-1.6,-0.4) J7(1.6,-0.4) J8(2.4,-0.4) J9(3.2,-0.4) K1(-3.2,-1.2) K2(-2.4,-1.2) K3(-1.6,-1.2) K7(1.6,-1.2) K8(2.4,-1.2) K9(3.2,-1.2) L1(-3.2,-2) L2(-2.4,-2) L3(-1.6,-2) L7(1.6,-2) L8(2.4,-2) L9(3.2,-2) M1(-3.2,-2.8) M2(-2.4,-2.8) M3(-1.6,-2.8) M7(1.6,-2.8) M8(2.4,-2.8) M9(3.2,-2.8) N1(-3.2,-3.6) N2(-2.4,-3.6) N3(-1.6,-3.6) N7(1.6,-3.6) N8(2.4,-3.6) N9(3.2,-3.6) P1(-3.2,-4.4) P2(-2.4,-4.4) P3(-1.6,-4.4) P7(1.6,-4.4) P8(2.4,-4.4) P9(3.2,-4.4) R1(-3.2,-5.2) R2(-2.4,-5.2) R3(-1.6,-5.2) R7(1.6,-5.2) R8(2.4,-5.2) R9(3.2,-5.2) T1(-3.2,-6) T2(-2.4,-6) T3(-1.6,-6) T7(1.6,-6) T8(2.4,-6) T9(3.2,-6)
R0201
  rect 0.25x0.3 smd: 1(-0.275,0) 2(0.275,0)
R0402
  rect 0.55x0.55 smd: 1(-0.45,0) 2(0.45,0)
R0402#2
  rect 0.5x0.5 smd: 1(-0.45,0) 2(0.45,0)
RP2_0405
  rect 0.5x0.3 smd: 1(-0.625,-0.275) 2(0.625,-0.275) 3(-0.625,0.275) 4(0.625,0.275)
SOT_23_5
  oval 1.1x0.6 smd: 1(0,0)
  rect 1.1x0.6 smd: 2(0,-1) 3(0,-2) 4(2.8,-2) 5(2.8,0)
TP_0R70
  round 0.7 smd: 1(0,0)

## Nets
DDR4_BG1//VSS: R3418.1 R3419.1 U3400.M9(VSS#M9) U3401.M9(VSS#M9) U3402.M9(VSS#M9) U3403.M9(VSS#M9)
GND: C1000.2 C1001.2 C1002.2 C1003.2 C1004.2 C1005.2 C1006.2 C1007.2 C1008.2 C1009.2 C1010.2 C1011.2 C1012.2 C1013.2 C1014.2 C1015.2 C1016.2 C1017.2 C1018.2 C1019.2 C1020.2 C1100.2 C1101.2 C1102.2 C1103.2 C1104.2 C1200.2 C1201.2 C1202.2 C1203.2 C1204.2 C1205.2 C1206.2 C1207.2 C1208.2 C1209.2 C1210.2 C1211.2 C1212.2 C1213.2 C1214.2 C1300.2 C1301.2 C1400.2 C1401.2 C1402.2 C1403.2 C1404.2 C1405.2 C1406.2 C1407.2 C1408.2 C1409.2 C1410.2 C1411.2 C1412.2 C1413.2 C1414.2 C1500.2 C1501.2 C1502.2 C1503.2 C1504.2 C1505.2 C1506.2 C1507.2 C1508.2 C1509.2 C1510.2 C1511.2 C1600.2 C1601.2 C1602.2 C1603.2 C1700.2 C1701.2 C1702.2 C1703.2 C1712.2 C1713.2 C1714.2 C1715.2 C1716.2 C1717.2 C1718.2 C1719.2 C1720.2 C1800.2 C1900.2 C3400.2 C3401.2 C3402.2 C3403.2 C3404.2 C3405.2 C3406.2 C3407.2 C3408.2 C3409.2 C3410.2 C3411.2 C3412.2 C3413.2 C3414.2 C3415.2 C3416.2 C3417.2 C3418.2 C3419.2 C3420.2 C3421.2 C3422.2 C3423.2 C3424.2 C3425.2 C3426.2 C3427.2 C3428.2 C3429.2 C3430.2 C3431.2 C3432.2 C3433.2 C3434.2 C3435.2 C3436.2 C3437.2 C3438.2 C3439.2 C3440.2 C3441.2 C3442.2 C3443.2 C3444.2 C3445.2 C3446.2 C3447.2 C3448.2 C3449.2 C3450.2 C3451.2 C3452.2 C3453.2 C3454.2 C3455.2 C3456.2 C3457.2 C3458.2 C3459.2 C3460.2 C3461.2 C3462.2 C3463.2 C3464.2 C3465.2 C3466.2 C3467.2 C3468.2 C3469.2 C3470.2 C3471.2 C3472.2 C3473.2 C3474.2 C3475.2 C3476.2 C3477.2 C3478.2 C3479.2 C3480.2 C3481.2 C3483.2 C3484.2 R1100.2 R1400.2 R1708.2 R3400.2 R3401.2 R3402.2 R3403.2 R3404.2 R3405.2 R3406.2 R3407.2 R3408.2 R3409.2 R3410.2 R3411.2 R3416.2 R3418.2 TP1301.1 TP1303.1 TP1502.1 U1000.A1(VSS_1) U1000.A3(VSS_2) U1000.A6(VSS_3) U1000.A10(VSS_4) U1000.A14(VSS_5) U1000.A18(VSS_6) U1000.A28(VSS_7) U1000.AA4(VSS_133) U1000.AA9(VSS_134) U1000.AA12(AVSS_24) U1000.AA14(AVSS_25) U1000.AA15(AVSS_26) U1000.AA17(AVSS_27) U1000.AA23(VSS_135) U1000.AA24(AVSS_28) U1000.AA26(AVSS_29) U1000.AB2(VSS_136) U1000.AB6(VSS_137) U1000.AB11(AVSS_30) U1000.AB12(AVSS_31) U1000.AB14(AVSS_32) U1000.AB15(AVSS_33) U1000.AB17(AVSS_34) U1000.AB24(TVSS) U1000.AC9(AVSS_35) U1000.AC11(AVSS_36) U1000.AC12(AVSS_37) U1000.AC15(AVSS_38) U1000.AC18(AVSS_39) U1000.AC25(AVSS_40) U1000.AC26(AVSS_41) U1000.AD3(VSS_138) U1000.AD26(AVSS_42) U1000.AE6(VSS_139) U1000.AE14(AVSS_43) U1000.AE17(AVSS_44) U1000.AE20(AVSS_45) U1000.AE21(VSS_140) U1000.AE27(AVSS_46) U1000.AE28(AVSS_47) U1000.AF3(VSS_141) U1000.AF9(AVSS_48) U1000.AF11(AVSS_49) U1000.AF12(AVSS_50) U1000.AF14(AVSS_51) U1000.AF15(AVSS_52) U1000.AF17(AVSS_53) U1000.AF18(AVSS_54) U1000.AF20(AVSS_55) U1000.AF21(AVSS_56) U1000.AF26(VSS_142) U1000.AG5(VSS_143) U1000.AG18(AVSS_57) U1000.AH1(VSS_144) U1000.AH8(VSS_145) U1000.AH18(AVSS_58) U1000.AH23(AVSS_59) U1000.AH28(VSS_146) U1000.B5(VSS_8) U1000.B9(VSS_9) U1000.B12(VSS_10) U1000.B16(VSS_11) U1000.B23(VSS_12) U1000.B26(VSS_13) U1000.C3(VSS_14) U1000.C6(VSS_15) U1000.C8(VSS_16) U1000.C9(VSS_17) U1000.C11(VSS_18) U1000.C12(VSS_19) U1000.C14(VSS_20) U1000.C15(VSS_21) U1000.C17(VSS_22) U1000.C18(VSS_23) U1000.C25(VSS_24) U1000.D2(VSS_25) U1000.D3(VSS_26) U1000.D11(VSS_27) U1000.D28(VSS_28) U1000.E3(VSS_29) U1000.E7(VSS_30) U1000.F1(VSS_31) U1000.F3(VSS_32) U1000.F9(VSS_33) U1000.F12(VSS_34) U1000.F14(VSS_35) U1000.F15(VSS_36) U1000.F17(VSS_37) U1000.G5(VSS_38) U1000.G6(VSS_39) U1000.G8(VSS_40) U1000.G9(VSS_41) U1000.G11(VSS_42) U1000.G12(VSS_43) U1000.G14(VSS_44) U1000.G15(VSS_45) U1000.G17(VSS_46) U1000.G18(VSS_47) U1000.G24(VSS_48) U1000.H2(VSS_49) U1000.H3(VSS_50) U1000.H6(VSS_51) U1000.J3(VSS_52) U1000.J5(VSS_53) U1000.J8(DDR_AVSS) U1000.J17(VSS_54) U1000.J18(VSS_55) U1000.J20(VSS_56) U1000.J22(VSS_57) U1000.J26(VSS_58) U1000.J27(AVSS_1) U1000.K1(VSS_59) U1000.K11(VSS_60) U1000.K12(VSS_61) U1000.K13(VSS_62) U1000.K14(VSS_63) U1000.K19(VSS_64) U1000.L3(VSS_65) U1000.L5(VSS_66) U1000.L8(VSS_67) U1000.L11(VSS_68) U1000.L13(VSS_69) U1000.L14(VSS_70) U1000.L19(VSS_71) U1000.L20(VSS_72) U1000.L21(VSS_73) U1000.L24(AVSS_2) U1000.L26(AVSS_3) U1000.M2(VSS_74) U1000.M3(VSS_75) U1000.M6(VSS_76) U1000.M8(VSS_77) U1000.M11(VSS_78) U1000.M13(VSS_79) U1000.M14(VSS_80) U1000.M16(VSS_81) U1000.M18(VSS_82) U1000.M21(AVSS_4) U1000.M26(AVSS_5) U1000.N1(VSS_83) U1000.N11(SYSPLL_AVSS) U1000.N12(VSS_84) U1000.N14(VSS_85) U1000.N15(VSS_86) U1000.N17(VSS_87) U1000.N18(VSS_88) U1000.N28(AVSS_6) U1000.P3(VSS_89) U1000.P6(VSS_90) U1000.P12(VSS_91) U1000.P14(VSS_92) U1000.P15(VSS_93) U1000.P17(VSS_94) U1000.P21(AVSS_7) U1000.P26(AVSS_8) U1000.R3(VSS_95) U1000.R6(VSS_96) U1000.R10(VSS_97) U1000.R11(VSS_98) U1000.R14(VSS_99) U1000.R15(VSS_100) U1000.R17(VSS_101) U1000.R18(VSS_102) U1000.R19(VSS_103) U1000.R23(AVSS_9) U1000.R26(AVSS_10) U1000.T10(VSS_104) U1000.T11(VSS_105) U1000.T14(VSS_106) U1000.T15(VSS_107) U1000.T17(VSS_108) U1000.T18(VSS_109) U1000.T19(VSS_110) U1000.U1(VSS_111) U1000.U6(VSS_112) U1000.U7(VSS_113) U1000.U8(VSS_114) U1000.U10(VSS_115) U1000.U14(VSS_116) U1000.U15(VSS_117) U1000.U16(VSS_118) U1000.U17(VSS_119) U1000.U18(VSS_120) U1000.U23(AVSS_11) U1000.U26(AVSS_12) U1000.V3(VSS_121) U1000.V8(VSS_122) U1000.V9(VSS_123) U1000.V13(VSS_124) U1000.V14(AVSS_13) U1000.V15(AVSS_14) U1000.V16(AVSS_15) U1000.V20(PMUPLL_AVSS) U1000.V22(AVSS_16) U1000.V23(AVSS_17) U1000.V26(AVSS_18) U1000.W10(VSS_125) U1000.W11(VSS_126) U1000.W12(VSS_127) U1000.W13(VSS_128) U1000.W17(AVSS_19) U1000.Y8(VSS_129) U1000.Y9(VSS_130) U1000.Y11(VSS_131) U1000.Y12(VSS_132) U1000.Y18(AVSS_20) U1000.Y23(AVSS_21) U1000.Y24(AVSS_22) U1000.Y26(AVSS_23) U3400.A2(VSSQ#A2) U3400.A8(VSSQ#A8) U3400.B2(VSS#B2) U3400.C9(VSSQ#C9) U3400.D2(VSSQ#D2) U3400.D8(VSSQ#D8) U3400.E1(VSS#E1) U3400.E3(VSSQ#E3) U3400.E8(VSSQ#E8) U3400.F1(VSSQ#F1) U3400.G8(VSS#G8) U3400.H1(VSSQ#H1) U3400.H9(VSSQ#H9) U3400.K1(VSS#K1) U3400.K9(VSS#K9) U3400.N1(VSS#N1) U3400.N9(TEN) U3400.T1(VSS#T1) U3400.T3(PAR) U3401.A2(VSSQ#A2) U3401.A8(VSSQ#A8) U3401.B2(VSS#B2) U3401.C9(VSSQ#C9) U3401.D2(VSSQ#D2) U3401.D8(VSSQ#D8) U3401.E1(VSS#E1) U3401.E3(VSSQ#E3) U3401.E8(VSSQ#E8) U3401.F1(VSSQ#F1) U3401.G8(VSS#G8) U3401.H1(VSSQ#H1) U3401.H9(VSSQ#H9) U3401.K1(VSS#K1) U3401.K9(VSS#K9) U3401.N1(VSS#N1) U3401.N9(TEN) U3401.T1(VSS#T1) U3401.T3(PAR) U3402.A2(VSSQ#A2) U3402.A8(VSSQ#A8) U3402.B2(VSS#B2) U3402.C9(VSSQ#C9) U3402.D2(VSSQ#D2) U3402.D8(VSSQ#D8) U3402.E1(VSS#E1) U3402.E3(VSSQ#E3) U3402.E8(VSSQ#E8) U3402.F1(VSSQ#F1) U3402.G8(VSS#G8) U3402.H1(VSSQ#H1) U3402.H9(VSSQ#H9) U3402.K1(VSS#K1) U3402.K9(VSS#K9) U3402.N1(VSS#N1) U3402.N9(TEN) U3402.T1(VSS#T1) U3402.T3(PAR) U3403.A2(VSSQ#A2) U3403.A8(VSSQ#A8) U3403.B2(VSS#B2) U3403.C9(VSSQ#C9) U3403.D2(VSSQ#D2) U3403.D8(VSSQ#D8) U3403.E1(VSS#E1) U3403.E3(VSSQ#E3) U3403.E8(VSSQ#E8) U3403.F1(VSSQ#F1) U3403.G8(VSS#G8) U3403.H1(VSSQ#H1) U3403.H9(VSSQ#H9) U3403.K1(VSS#K1) U3403.K9(VSS#K9) U3403.N1(VSS#N1) U3403.N9(TEN) U3403.T1(VSS#T1) U3403.T3(PAR) U3404.2(GND) Y1200.2(GND#2) Y1200.4(GND#4)
VCC3V3_PMU: C1203.1 C1210.1 R1204.1 R1205.1 R1206.1 R1207.1 R3417.1 U1000.W19(PMUIO2) U1000.Y20(PMUIO1)
VCC3V3_SYS: C3409.1 U3404.1(IN)
VCC25_DDR: C3410.1 C3411.1 C3412.1 C3413.1 C3414.1 C3415.1 C3416.1 C3417.1 C3418.1 C3419.1 C3484.1 U3400.B1(VPP1) U3400.R9(VPP2) U3401.B1(VPP1) U3401.R9(VPP2) U3402.B1(VPP1) U3402.R9(VPP2) U3403.B1(VPP1) U3403.R9(VPP2) U3404.5(OUT)
VCC_1V8: C1511.1 R1509.2 R1610.2 U1000.H20(OTP_VCC18)
VCC_3V3: C1401.1 C1404.1 C1509.1 C1800.1 R1511.2 R1611.2 R1800.1 R1801.1 R1804.1 R1805.1 U1000.M23(USB3_AVDD_3V3) U1000.P10(USB2_AVDD_3V3) U1000.V10(VCCIO5_1) U1000.V11(VCCIO5_2) U1000.V12(VCCIO7)
VCC_DDR: C1100.1 C1101.1 C1102.1 C1103.1 C1104.1 C3422.1 C3423.1 C3424.1 C3425.1 C3426.1 C3427.1 C3428.1 C3429.1 C3430.1 C3431.1 C3432.1 C3433.1 C3434.1 C3435.1 C3436.1 C3437.1 C3438.1 C3439.1 C3440.1 C3441.1 C3442.1 C3443.1 C3444.1 C3445.1 C3446.1 C3447.1 C3448.1 C3449.1 C3450.1 C3451.1 C3452.1 C3453.1 C3454.1 C3455.1 C3456.1 C3457.1 C3458.1 C3459.1 C3460.1 C3461.1 C3462.1 C3463.1 C3464.1 C3465.1 C3466.1 C3467.1 C3468.1 C3469.1 C3470.1 C3471.1 C3472.1 C3473.1 C3474.1 C3475.1 C3476.1 C3477.1 C3478.1 C3479.1 C3480.1 C3481.1 C3482.1 R3414.1 U1000.H9(DDRPHY_VDDQ_1) U1000.H11(DDRPHY_VDDQ_2) U1000.H12(DDRPHY_VDDQ_3) U1000.H14(DDRPHY_VDDQ_4) U1000.H15(DDRPHY_VDDQ_5) U1000.J9(DDRPHY_VDDQ_6) U1000.J11(DDRPHY_VDDQL_1) U1000.J12(DDRPHY_VDDQL_2) U1000.J14(DDRPHY_VDDQL_3) U1000.K10(DDRPHY_VDDQL_4) U1000.L9(DDRPHY_VDDQ_7) U1000.L10(DDRPHY_VDDQL_5) U1000.M9(DDRPHY_VDDQ_8) U1000.M10(DDRPHY_VDDQL_6) U3400.A1(VDDQ#A1) U3400.A9(VDDQ#A9) U3400.B3(VDD#B3) U3400.B9(VDD#B9) U3400.C1(VDDQ#C1) U3400.D1(VDD#D1) U3400.D9(VDDQ#D9) U3400.F2(VDDQ#F2) U3400.F8(VDDQ#F8) U3400.G1(VDDQ#G1) U3400.G7(VDD#G7) U3400.G9(VDDQ#G9) U3400.J1(VDD#J1) U3400.J2(VDDQ#J2) U3400.J8(VDDQ#J8) U3400.J9(VDD#J9) U3400.L1(VDD#L1) U3400.L9(VDD#L9) U3400.R1(VDD#R1) U3400.T9(VDD#T9) U3401.A1(VDDQ#A1) U3401.A9(VDDQ#A9) U3401.B3(VDD#B3) U3401.B9(VDD#B9) U3401.C1(VDDQ#C1) U3401.D1(VDD#D1) U3401.D9(VDDQ#D9) U3401.F2(VDDQ#F2) U3401.F8(VDDQ#F8) U3401.G1(VDDQ#G1) U3401.G7(VDD#G7) U3401.G9(VDDQ#G9) U3401.J1(VDD#J1) U3401.J2(VDDQ#J2) U3401.J8(VDDQ#J8) U3401.J9(VDD#J9) U3401.L1(VDD#L1) U3401.L9(VDD#L9) U3401.R1(VDD#R1) U3401.T9(VDD#T9) U3402.A1(VDDQ#A1) U3402.A9(VDDQ#A9) U3402.B3(VDD#B3) U3402.B9(VDD#B9) U3402.C1(VDDQ#C1) U3402.D1(VDD#D1) U3402.D9(VDDQ#D9) U3402.F2(VDDQ#F2) U3402.F8(VDDQ#F8) U3402.G1(VDDQ#G1) U3402.G7(VDD#G7) U3402.G9(VDDQ#G9) U3402.J1(VDD#J1) U3402.J2(VDDQ#J2) U3402.J8(VDDQ#J8) U3402.J9(VDD#J9) U3402.L1(VDD#L1) U3402.L9(VDD#L9) U3402.R1(VDD#R1) U3402.T9(VDD#T9) U3403.A1(VDDQ#A1) U3403.A9(VDDQ#A9) U3403.B3(VDD#B3) U3403.B9(VDD#B9) U3403.C1(VDDQ#C1) U3403.D1(VDD#D1) U3403.D9(VDDQ#D9) U3403.F2(VDDQ#F2) U3403.F8(VDDQ#F8) U3403.G1(VDDQ#G1) U3403.G7(VDD#G7) U3403.G9(VDDQ#G9) U3403.J1(VDD#J1) U3403.J2(VDDQ#J2) U3403.J8(VDDQ#J8) U3403.J9(VDD#J9) U3403.L1(VDD#L1) U3403.L9(VDD#L9) U3403.R1(VDD#R1) U3403.T9(VDD#T9)
VCCA1V8_IMAGE: C1713.1 C1715.1 C1717.1 C1720.1 U1000.M22(EDP_TX_AVDD_1V8) U1000.W18(HDMI_TX_AVDD_1V8)
VCCA1V8_PMU: C1206.1 C1207.1 U1000.Y21(PMUPLL_AVDD_1V8)
VCCA_1V8: C1211.1 C1212.1 C1407.1 C1410.1 C1411.1 C1414.1 C1510.1 R1512.1 U1000.H22(SARADC_AVDD_1V8) U1000.N10(SYSPLL_AVDD_1V8) U1000.R22(MULTI_PHY_AVDD_1V8) U1000.U22(PCIE30_AVDD_1V8)
VCCIO4: C1500.1 R1509.1 R1510.1 R1511.1 U1000.J21(VCCIO4)
VCCIO6: C1602.1 C1603.1 R1606.1 R1607.1 R1610.1 R1611.1 U1000.R9(VCCIO6_1) U1000.U9(VCCIO6_2)
VCCIO_ACODEC: C1900.1 R1900.1 R1901.1 U1000.H17(VCCIO1)
VCCIO_FLASH: C1300.1 U1000.H18(VCCIO2)
VCCIO_SD: C1301.1 U1000.L22(VCCIO3)
VCCIO_WL: R1510.2
VDD_CPU: C1000.1 C1001.1 C1002.1 C1003.1 C1004.1 U1000.J15(VDD_CPU_1) U1000.K15(VDD_CPU_2) U1000.K16(VDD_CPU_3) U1000.K17(VDD_CPU_4) U1000.K18(VDD_CPU_5) U1000.L15(VDD_CPU_6) U1000.L16(VDD_CPU_7) U1000.L17(VDD_CPU_8) U1000.L18(VDD_CPU_9) U1000.M17(VDD_CPU_10)
VDD_CPU_COM: U1000.M15(VDD_CPU_COM)
VDD_GPU: C1012.1 C1013.1 C1014.1 C1015.1 C1016.1 U1000.R13(VDD_GPU_1) U1000.T13(VDD_GPU_2) U1000.U11(VDD_GPU_3) U1000.U12(VDD_GPU_4) U1000.U13(VDD_GPU_5)
VDD_LOGIC: C1005.1 C1006.1 C1007.1 C1008.1 C1009.1 C1010.1 C1011.1 U1000.L12(VDD_LOGIC_1) U1000.M12(VDD_LOGIC_2) U1000.N13(VDD_LOGIC_3) U1000.N16(VDD_LOGIC_4) U1000.P13(VDD_LOGIC_5) U1000.P16(VDD_LOGIC_6) U1000.R12(VDD_LOGIC_7) U1000.R16(VDD_LOGIC_8) U1000.T12(VDD_LOGIC_9) U1000.T16(VDD_LOGIC_10)
VDD_NPU: C1017.1 C1018.1 C1019.1 C1020.1 U1000.M19(VDD_NPU_1) U1000.N19(VDD_NPU_2) U1000.P18(VDD_NPU_3) U1000.P19(VDD_NPU_4) U1000.P20(VDD_NPU_5)
VDDA0V9_IMAGE: C1714.1 C1716.1 C1718.1 C1719.1 U1000.M20(EDP_TX_AVDD_0V9) U1000.V17(HDMI_TX_AVDD_0V9_1) U1000.V18(HDMI_TX_AVDD_0V9_2)
VDDA0V9_PMU: C1204.1 C1205.1 C1213.1 C1214.1 U1000.V19(PMU_VDD_LOGIC_0V9) U1000.V21(PMUPLL_AVDD_0V9)
VDDA_0V9: C1208.1 C1209.1 C1408.1 C1409.1 C1412.1 C1413.1 U1000.P11(SYSPLL_AVDD_0V9) U1000.R20(MULTI_PHY_AVDD_0V9_1) U1000.R21(MULTI_PHY_AVDD_0V9_2) U1000.U20(PCIE30_AVDD_0V9_2) U1000.U21(PCIE30_AVDD_0V9_1)
4G_DISABLE_GPIO4_C2: U1000.AF8(GPIO4_C2_D)
4G_PWREN_H_GPIO0_C6: U1000.AD20(GPIO0_C6_D)
BT_REG_ON_H_GPIO2_B7: U1000.H25(GPIO2_B7_D)
BT_WAKE_HOST_H_GPIO2_C0: U1000.F24(GPIO2_C0_D)
CAN0_RX_M1: R1304.1 U1000.H28(GPIO2_A2_D)
CAN0_TX_M1: U1000.H27(GPIO2_A1_U)
CIF_CLKOUT: R1609.2
CIF_CLKOUT_SOC: R1609.1 U1000.U3(GPIO4_C0_D)
CLK32K_OUT1_WIFI: R1508.2
DDR4_0_CLKN: R3420.2 U3400.K8(CK_N) U3402.K8(CK_N)
DDR4_0_CLKP: R3421.2 U3400.K7(CK_P) U3402.K7(CK_P)
DDR4_1_CLKN: R3422.2 U3401.K8(CK_N) U3403.K8(CK_N)
DDR4_1_CLKP: R3423.2 U3401.K7(CK_P) U3403.K7(CK_P)
DDR4_A0: U1000.B6(AC0) U3400.P3(A0) U3401.P3(A0) U3402.P3(A0) U3403.P3(A0)
DDR4_A1: U1000.F5(AC1) U3400.P7(A1) U3401.P7(A1) U3402.P7(A1) U3403.P7(A1)
DDR4_A2: U1000.B1(AC2) U3400.R3(A2) U3401.R3(A2) U3402.R3(A2) U3403.R3(A2)
DDR4_A3: U1000.F4(AC3) U3400.N7(A3) U3401.N7(A3) U3402.N7(A3) U3403.N7(A3)
DDR4_A4: U1000.D9(AC4) U3400.N3(A4) U3401.N3(A4) U3402.N3(A4) U3403.N3(A4)
DDR4_A5: U1000.B7(AC5) U3400.P8(A5) U3401.P8(A5) U3402.P8(A5) U3403.P8(A5)
DDR4_A6: U1000.A7(AC6) U3400.P2(A6) U3401.P2(A6) U3402.P2(A6) U3403.P2(A6)
DDR4_A7: U1000.A8(AC7) U3400.R8(A7) U3401.R8(A7) U3402.R8(A7) U3403.R8(A7)
DDR4_A8: U1000.C1(AC8) U3400.R2(A8) U3401.R2(A8) U3402.R2(A8) U3403.R2(A8)
DDR4_A9: U1000.A5(AC9) U3400.R7(A9) U3401.R7(A9) U3402.R7(A9) U3403.R7(A9)
DDR4_A10: U1000.D6(AC10) U3400.M3(A10/AP) U3401.M3(A10/AP) U3402.M3(A10/AP) U3403.M3(A10/AP)
DDR4_A11: U1000.C2(AC11) U3400.T2(A11) U3401.T2(A11) U3402.T2(A11) U3403.T2(A11)
DDR4_A12: U1000.C4(AC12) U3400.M7(A12/BC_N) U3401.M7(A12/BC_N) U3402.M7(A12/BC_N) U3403.M7(A12/BC_N)
DDR4_A13: U1000.B8(AC13) U3400.T8(A13) U3401.T8(A13) U3402.T8(A13) U3403.T8(A13)
DDR4_A14_WEN: U1000.C5(AC14) U3400.L2(WE_N/A14) U3401.L2(WE_N/A14) U3402.L2(WE_N/A14) U3403.L2(WE_N/A14)
DDR4_A15_CASN: U1000.E4(AC15) U3400.M8(CAS_N/A15) U3401.M8(CAS_N/A15) U3402.M8(CAS_N/A15) U3403.M8(CAS_N/A15)
DDR4_A16_RASN: U1000.D5(AC16) U3400.L8(RAS_N/A16) U3401.L8(RAS_N/A16) U3402.L8(RAS_N/A16) U3403.L8(RAS_N/A16)
DDR4_ACTN: U1000.E6(AC17) U3400.L3(ACT_N) U3401.L3(ACT_N) U3402.L3(ACT_N) U3403.L3(ACT_N)
DDR4_BA0: U1000.E11(AC18) U3400.N2(BA0) U3401.N2(BA0) U3402.N2(BA0) U3403.N2(BA0)
DDR4_BA1: U1000.E9(AC19) U3400.N8(BA1) U3401.N8(BA1) U3402.N8(BA1) U3403.N8(BA1)
DDR4_BG0: U1000.F8(AC20) U3400.M2(BG0) U3401.M2(BG0) U3402.M2(BG0) U3403.M2(BG0)
DDR4_BG1: R3419.2 U1000.F7(AC21)
DDR4_CKE: U1000.B3(AC22) U3400.K2(CKE) U3401.K2(CKE) U3402.K2(CKE) U3403.K2(CKE)
DDR4_CLKN: R3413.1 R3420.1 R3422.1 U1000.A4(AC24)
DDR4_CLKP: R3412.1 R3421.1 R3423.1 U1000.B4(AC23)
DDR4_CS0N: U1000.A2(AC25) U3400.L7(CS_N) U3401.L7(CS_N)
DDR4_CS1N: U1000.B2(AC26) U3402.L7(CS_N) U3403.L7(CS_N)
DDR4_DML_A: U1000.H5(DDR_DM0_A) U3400.E7(DML_N/DBIL_N) U3402.E7(DML_N/DBIL_N)
DDR4_DML_B: U1000.E17(DDR_DM1_B) U3401.E7(DML_N/DBIL_N) U3403.E7(DML_N/DBIL_N)
DDR4_DMU_A: U1000.J4(DDR_DM1_A) U3400.E2(DMU_N/DBIU_N) U3402.E2(DMU_N/DBIU_N)
DDR4_DMU_B: U1000.D14(DDR_DM0_B) U3401.E2(DMU_N/DBIU_N) U3403.E2(DMU_N/DBIU_N)
DDR4_DQL0_A: U1000.F2(DDR_DQ0_A) U3400.G2(DQL0) U3402.F7(DQL1)
DDR4_DQL0_B: U1000.A16(DDR_DQ8_B) U3401.G2(DQL0) U3403.F7(DQL1)
DDR4_DQL1_A: U1000.H4(DDR_DQ7_A) U3400.F7(DQL1) U3402.G2(DQL0)
DDR4_DQL1_B: U1000.D17(DDR_DQ14_B) U3401.F7(DQL1) U3403.G2(DQL0)
DDR4_DQL2_A: U1000.E1(DDR_DQ1_A) U3400.H3(DQL2) U3402.H7(DQL3)
DDR4_DQL2_B: U1000.B17(DDR_DQ9_B) U3401.H3(DQL2) U3403.H7(DQL3)
DDR4_DQL3_A: U1000.H1(DDR_DQ6_A) U3400.H7(DQL3) U3402.H3(DQL2)
DDR4_DQL3_B: U1000.B14(DDR_DQ15_B) U3401.H7(DQL3) U3403.H3(DQL2)
DDR4_DQL4_A: U1000.E2(DDR_DQ2_A) U3400.H2(DQL4) U3402.H8(DQL5)
DDR4_DQL4_B: U1000.A17(DDR_DQ10_B) U3401.H2(DQL4) U3403.H8(DQL5)
DDR4_DQL5_A: U1000.J2(DDR_DQ5_A) U3400.H8(DQL5) U3402.H2(DQL4)
DDR4_DQL5_B: U1000.A13(DDR_DQ13_B) U3401.H8(DQL5) U3403.H2(DQL4)
DDR4_DQL6_A: U1000.D1(DDR_DQ3_A) U3400.J3(DQL6) U3402.J7(DQL7)
DDR4_DQL6_B: U1000.B18(DDR_DQ11_B) U3401.J3(DQL6) U3403.J7(DQL7)
DDR4_DQL7_A: U1000.J1(DDR_DQ4_A) U3400.J7(DQL7) U3402.J3(DQL6)
DDR4_DQL7_B: U1000.B13(DDR_DQ12_B) U3401.J7(DQL7) U3403.J3(DQL6)
DDR4_DQSL_N_A: U1000.G2(DDR_DQS0N_A) U3400.F3(DQSL_N) U3402.F3(DQSL_N)
DDR4_DQSL_N_B: U1000.A15(DDR_DQS1N_B) U3401.F3(DQSL_N) U3403.F3(DQSL_N)
DDR4_DQSL_P_A: U1000.G1(DDR_DQS0P_A) U3400.G3(DQSL_P) U3402.G3(DQSL_P)
DDR4_DQSL_P_B: U1000.B15(DDR_DQS1P_B) U3401.G3(DQSL_P) U3403.G3(DQSL_P)
DDR4_DQSU_N_A: U1000.L1(DDR_DQS1N_A) U3400.A7(DQSU_N) U3402.A7(DQSU_N)
DDR4_DQSU_N_B: U1000.B11(DDR_DQS0N_B) U3401.A7(DQSU_N) U3403.A7(DQSU_N)
DDR4_DQSU_P_A: U1000.L2(DDR_DQS1P_A) U3400.B7(DQSU_P) U3402.B7(DQSU_P)
DDR4_DQSU_P_B: U1000.A11(DDR_DQS0P_B) U3401.B7(DQSU_P) U3403.B7(DQSU_P)
DDR4_DQU0_A: U1000.L4(DDR_DQ15_A) U3400.A3(DQU0) U3402.B8(DQU1)
DDR4_DQU0_B: U1000.A12(DDR_DQ4_B) U3401.A3(DQU0) U3403.B8(DQU1)
DDR4_DQU1_A: U1000.N2(DDR_DQ9_A) U3400.B8(DQU1) U3402.A3(DQU0)
DDR4_DQU1_B: U1000.E12(DDR_DQ3_B) U3401.B8(DQU1) U3403.A3(DQU0)
DDR4_DQU2_A: U1000.K2(DDR_DQ12_A) U3400.C3(DQU2) U3402.C7(DQU3)
DDR4_DQU2_B: U1000.E14(DDR_DQ7_B) U3401.C3(DQU2) U3403.C7(DQU3)
DDR4_DQU3_A: U1000.M1(DDR_DQ8_A) U3400.C7(DQU3) U3402.C3(DQU2)
DDR4_DQU3_B: U1000.D12(DDR_DQ2_B) U3401.C7(DQU3) U3403.C3(DQU2)
DDR4_DQU4_A: U1000.J6(DDR_DQ13_A) U3400.C2(DQU4) U3402.C8(DQU5)
DDR4_DQU4_B: U1000.E15(DDR_DQ6_B) U3401.C2(DQU4) U3403.C8(DQU5)
DDR4_DQU5_A: U1000.L6(DDR_DQ11_A) U3400.C8(DQU5) U3402.C2(DQU4)
DDR4_DQU5_B: U1000.A9(DDR_DQ1_B) U3401.C8(DQU5) U3403.C2(DQU4)
DDR4_DQU6_A: U1000.J7(DDR_DQ14_A) U3400.D3(DQU6) U3402.D7(DQU7)
DDR4_DQU6_B: U1000.D15(DDR_DQ5_B) U3401.D3(DQU6) U3403.D7(DQU7)
DDR4_DQU7_A: U1000.L7(DDR_DQ10_A) U3400.D7(DQU7) U3402.D3(DQU6)
DDR4_DQU7_B: U1000.B10(DDR_DQ0_B) U3401.D7(DQU7) U3403.D3(DQU6)
DDR4_ODT0: U1000.E8(AC27) U3400.K3(ODT) U3401.K3(ODT)
DDR4_ODT1: U1000.D8(AC28) U3402.K3(ODT) U3403.K3(ODT)
DDR4_RESETN: C3400.1 C3401.1 C3402.1 C3403.1 U1000.F11(AC29) U3400.P1(RESET_N) U3401.P1(RESET_N) U3402.P1(RESET_N) U3403.P1(RESET_N)
DDR_RZQ: R1100.1 U1000.H7(DDR_RZQ)
DDRPHY_VREFOUT: C3482.2 C3483.1 R3415.2 U1000.P8(DDR_VREFOUT)
DVP_PWREN0_H_GPIO0_B0: U1000.AD23(GPIO0_B0_U)
EDP_TX_AUXN: U1000.M25(EDP_TX_AUXN)
EDP_TX_AUXP: U1000.L25(EDP_TX_AUXP)
EDP_TX_D0N: C1705.2
EDP_TX_D0P: C1704.2
EDP_TX_D1N: C1709.2
EDP_TX_D1P: C1706.2
EDP_TX_D2N: C1708.2
EDP_TX_D2P: C1707.2
EDP_TX_D3N: C1711.2
EDP_TX_D3P: C1710.2
EDP_TXD0N: C1705.1 U1000.K27(EDP_TX_D0N)
EDP_TXD0P: C1704.1 U1000.J28(EDP_TX_D0P)
EDP_TXD1N: C1709.1 U1000.L27(EDP_TX_D1N)
EDP_TXD1P: C1706.1 U1000.K28(EDP_TX_D1P)
EDP_TXD2N: C1708.1 U1000.M27(EDP_TX_D2N)
EDP_TXD2P: C1707.1 U1000.L28(EDP_TX_D2P)
EDP_TXD3N: C1711.1 U1000.N27(EDP_TX_D3N)
EDP_TXD3P: C1710.1 U1000.M28(EDP_TX_D3P)
EMMC_CLKOUT/FLASH_DQS: R1300.2
EMMC_CLKOUT/FLASH_DQS_SOC: R1300.1 U1000.A23(GPIO1_C5_D)
EMMC_CMD/FLASH_WRN: U1000.B22(GPIO1_C4_U)
EMMC_D0/FLASH_D0: TP1300.1 U1000.A24(GPIO1_B4_U)
EMMC_D1/FLASH_D1: U1000.C21(GPIO1_B5_U)
EMMC_D2/FLASH_D2: U1000.B24(GPIO1_B6_U)
EMMC_D3/FLASH_D3: U1000.D21(GPIO1_B7_U)
EMMC_D4/FLASH_D4: U1000.A25(GPIO1_C0_U)
EMMC_D5/FLASH_D5: U1000.E21(GPIO1_C1_U)
EMMC_D6/FLASH_D6: U1000.E22(GPIO1_C2_U)
EMMC_D7/FLASH_D7: U1000.B25(GPIO1_C3_U)
EMMC_DATA_STROBE/FLASH_CLE: U1000.A26(GPIO1_C6_D)
EMMC_RSTN/FSPI_D2/FLASH_WPN: U1000.F20(GPIO1_C7_D)
ETH0_REFCLKO_25M: R1507.2
ETH1_REFCLKO_25M_M1: R1608.2
ETH1_REFCLKO_25M_M1_SOC: R1608.1 U1000.V1(GPIO4_B3_D)
FLASH_VOL_SEL: U1000.AG25(GPIO0_A7_U)
FSPI_CLK/FLASH_ALE: R1301.2 TP1302.1
FSPI_CLK/FLASH_ALE_SOC: R1301.1 U1000.A22(GPIO1_D0_D)
FSPI_CS0N/FLASH_CS0N: U1000.C23(GPIO1_D3_U)
